# EAGLE board SparkFun_IoT_RedBoard-ESP32-Panel (EAGLE 9.6.2), part 1 of 4
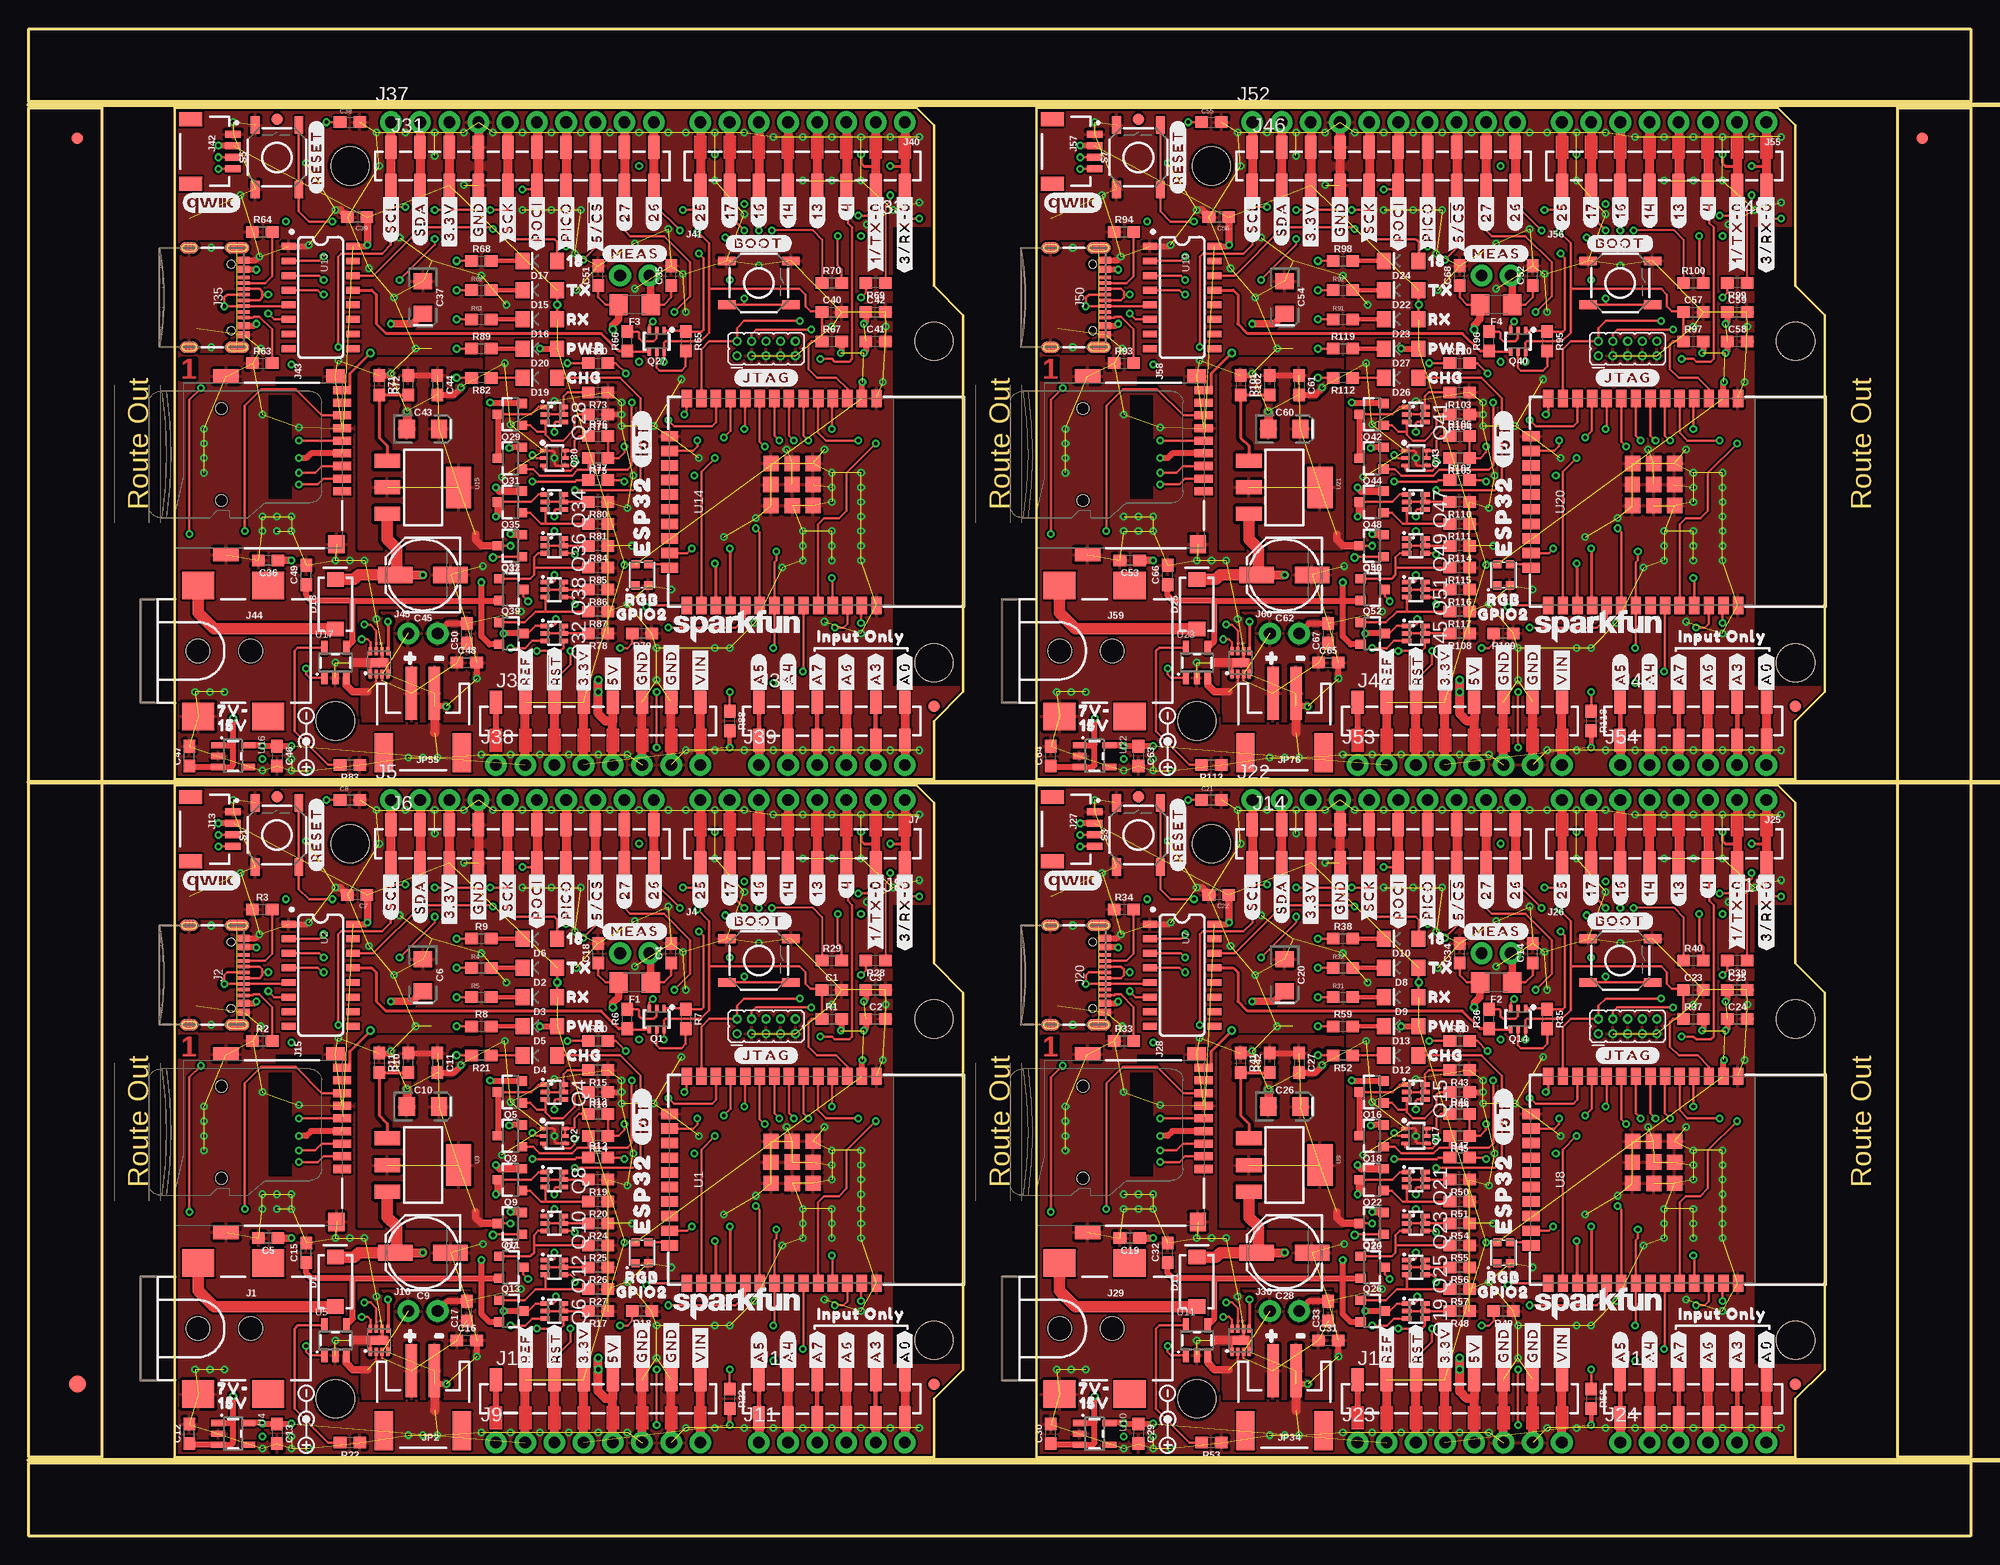
[diagram p0: board, top side]
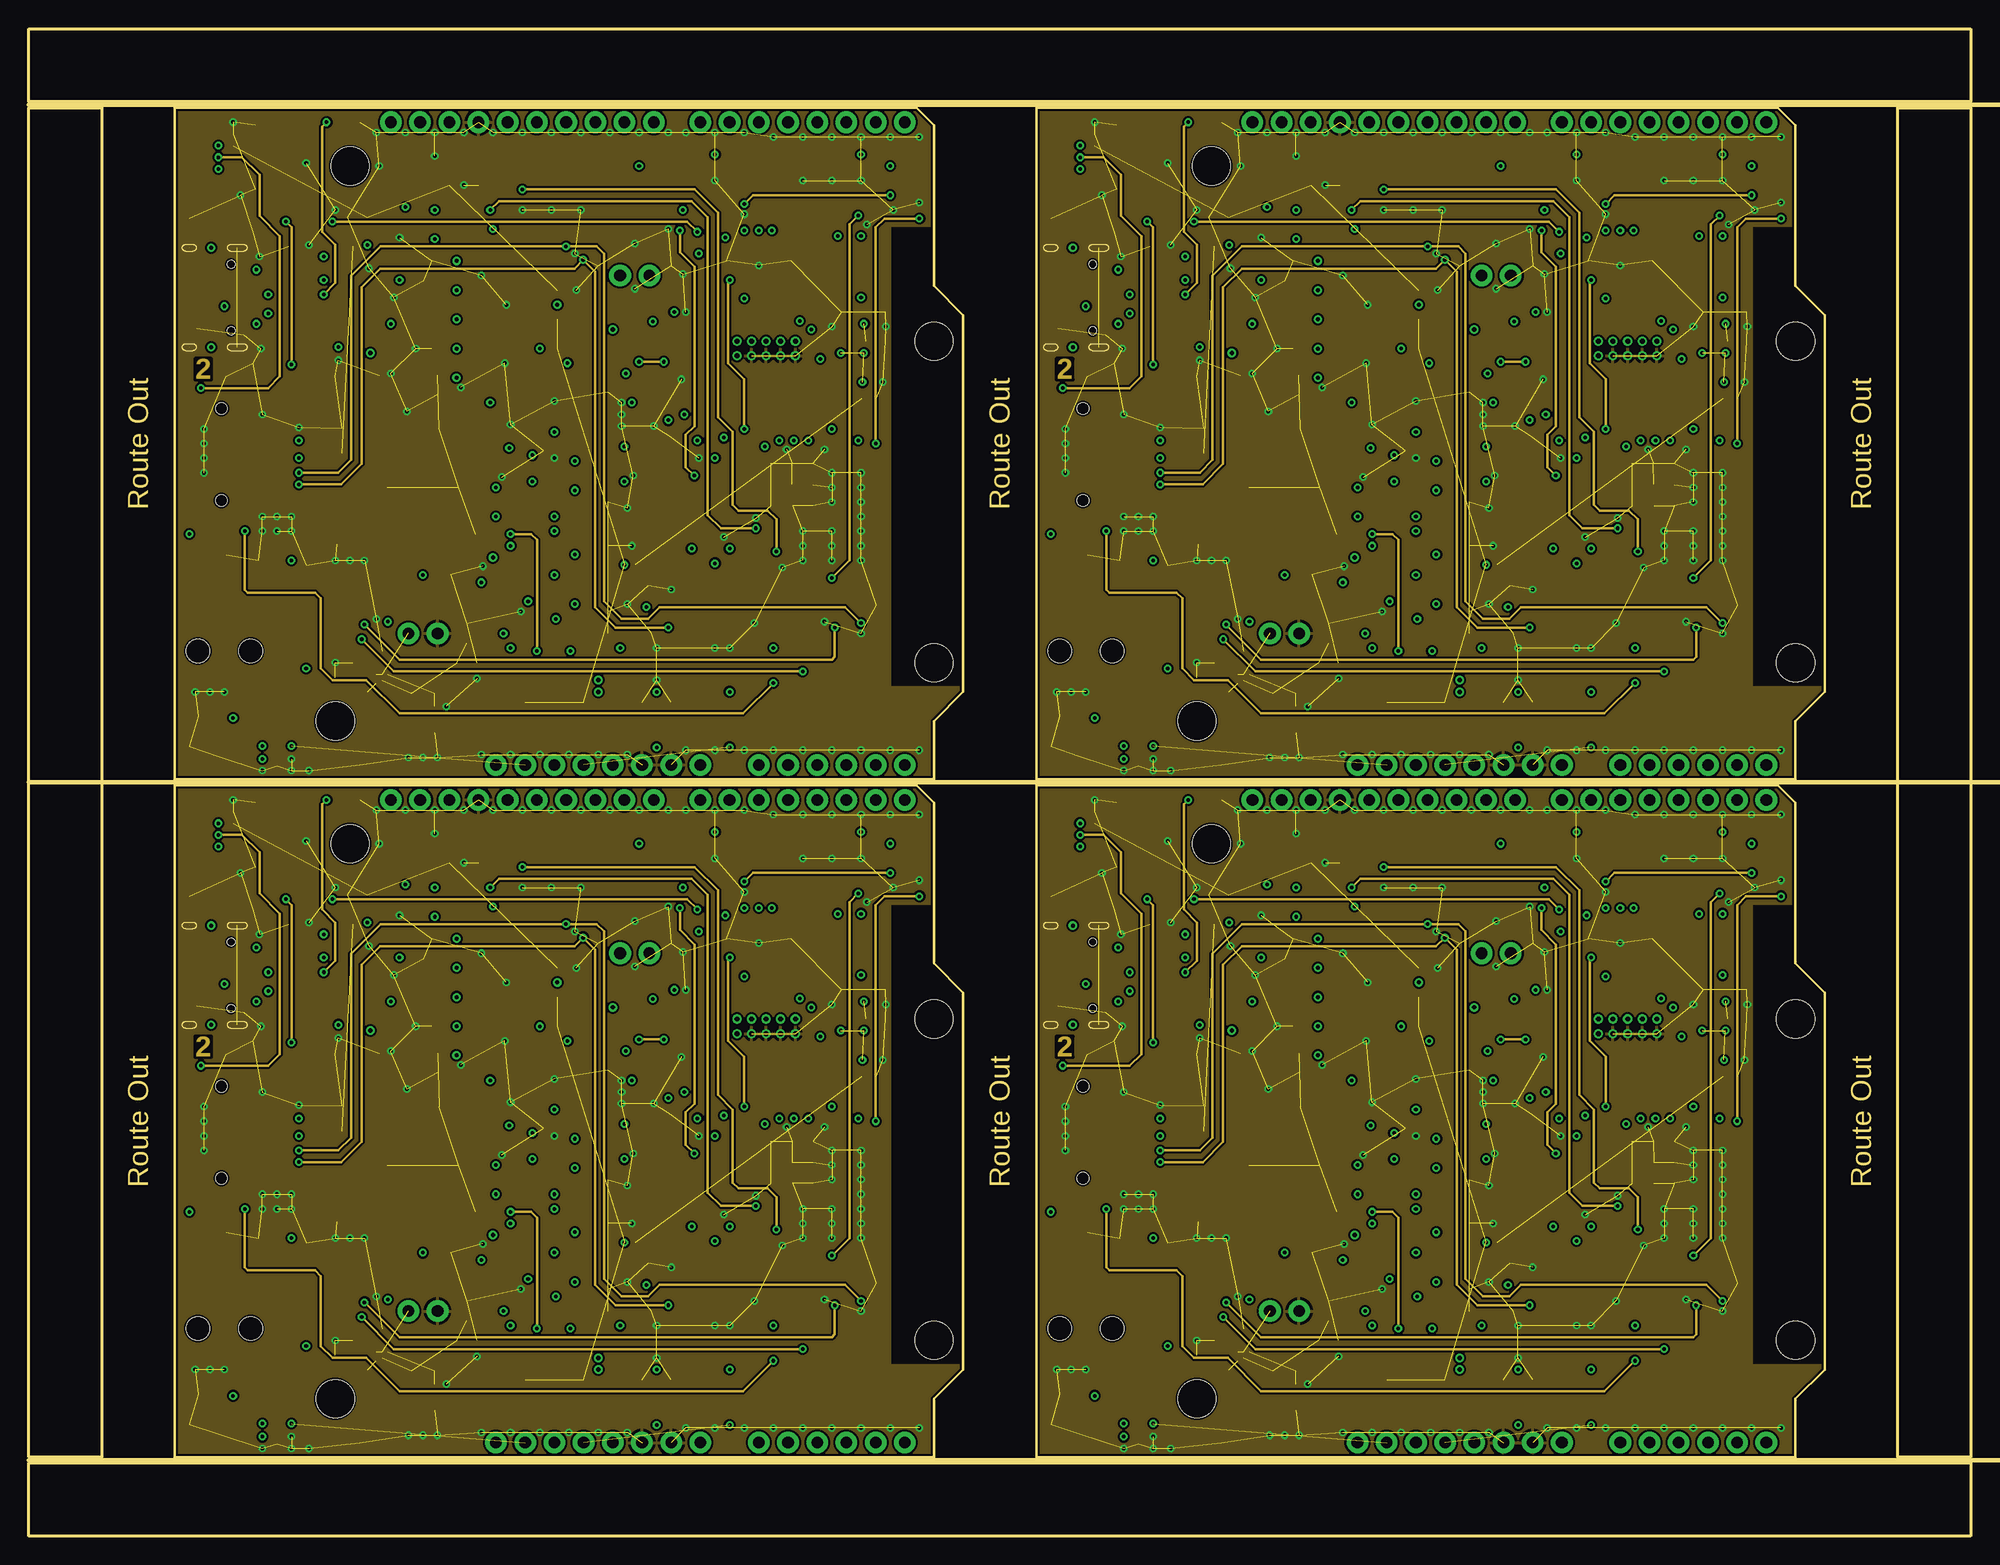
[diagram p1: board, inner layer Route2]
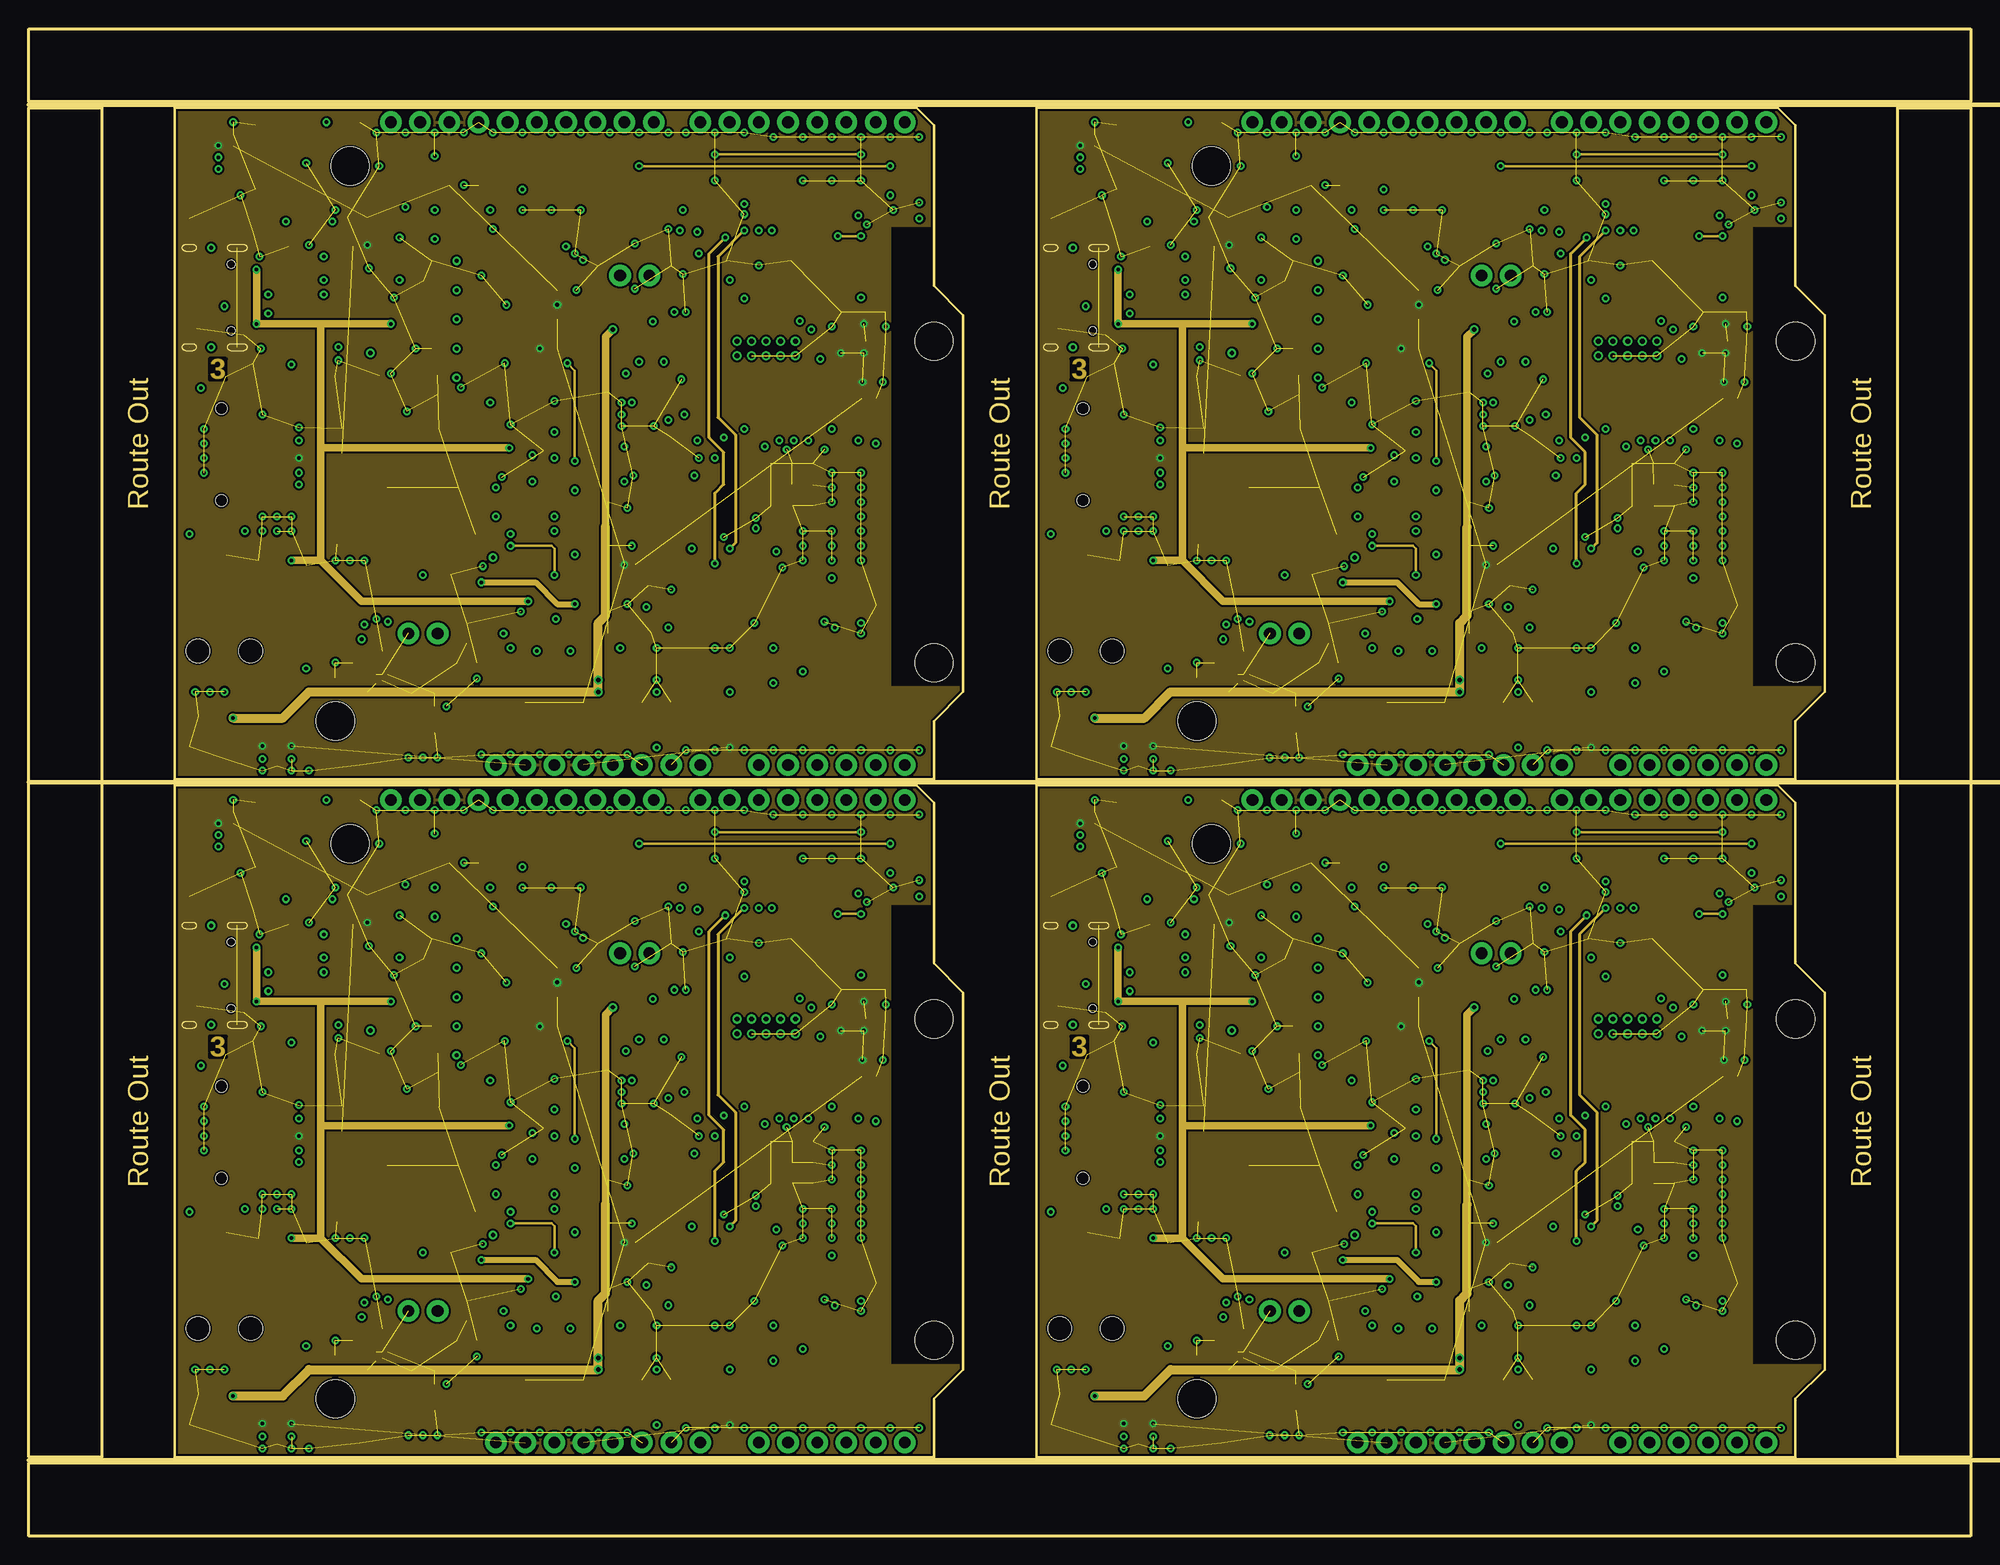
[diagram p2: board, inner layer Route15]
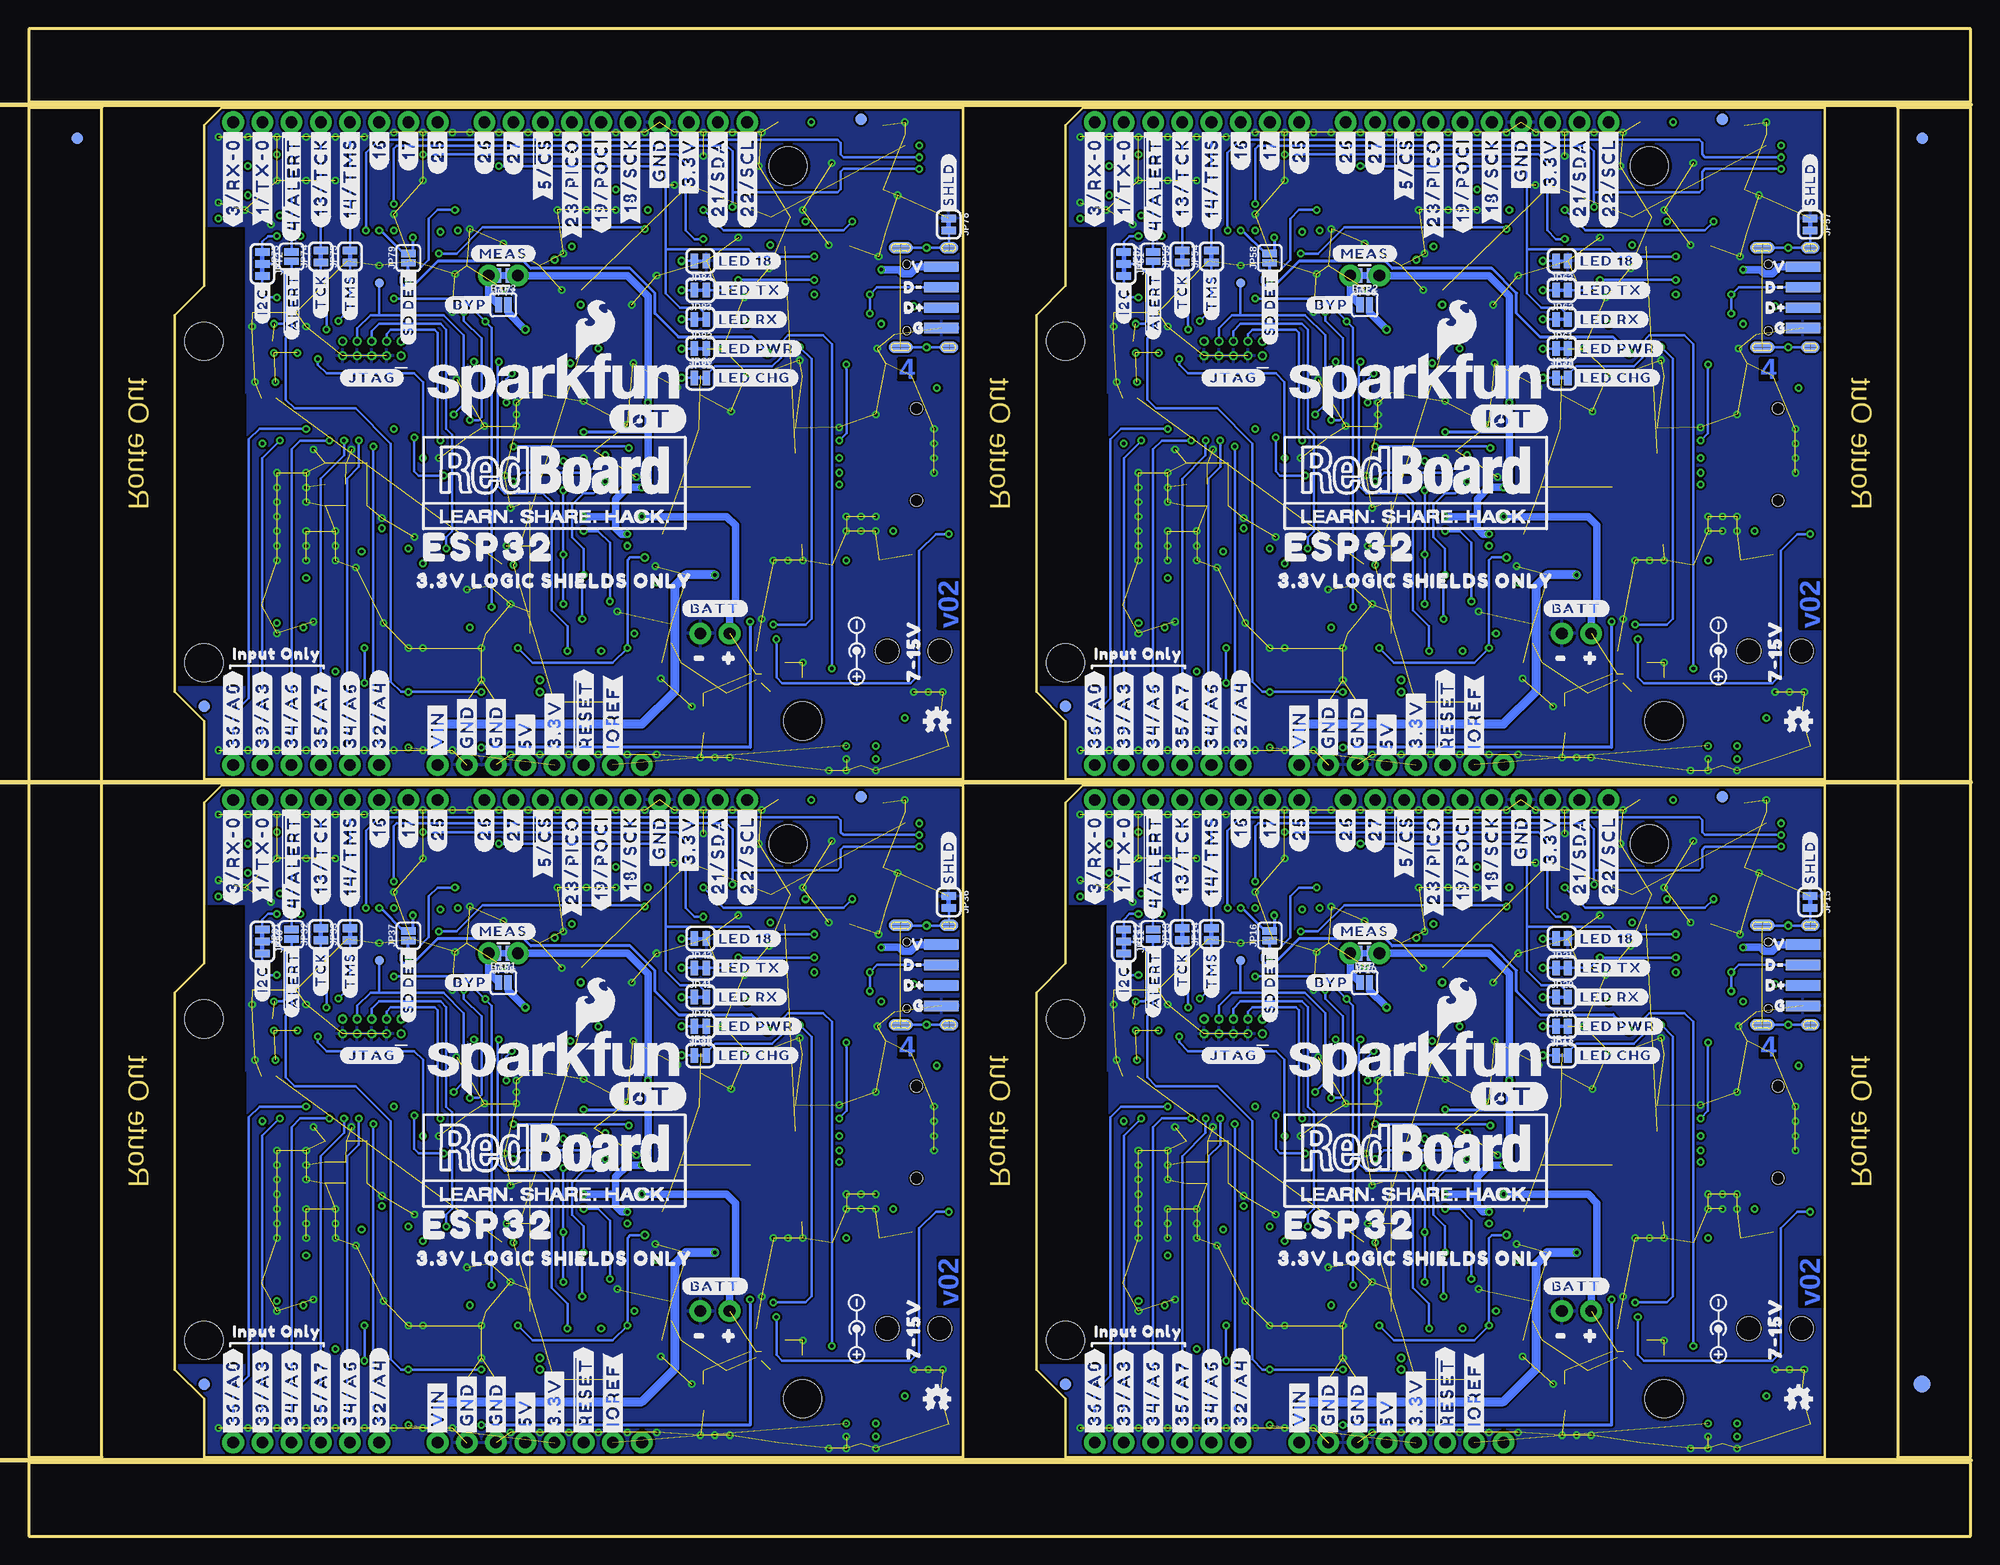
[diagram p3: board, bottom side, seen from below]

Size 168.91 x 131.06 mm. Coordinates in mm from the lower left corner, seen from the top.
Outline: 12.7,65.28 77.22,65.28 78.74,63.75 78.74,49.78 81.28,47.24 81.28,14.48 78.74,11.94 78.74,6.86 12.7,6.86 12.7,65.28
Outline: 87.63,65.28 152.15,65.28 153.67,63.75 153.67,49.78 156.21,47.24 156.21,14.48 153.67,11.94 153.67,6.86 87.63,6.86 87.63,65.28
Outline: 12.7,124.21 77.22,124.21 78.74,122.68 78.74,108.71 81.28,106.17 81.28,73.41 78.74,70.87 78.74,65.79 12.7,65.79 12.7,124.21
Outline: 87.63,124.21 152.15,124.21 153.67,122.68 153.67,108.71 156.21,106.17 156.21,73.41 153.67,70.87 153.67,65.79 87.63,65.79 87.63,124.21
Outline: 0,6.35 168.91,6.35 168.91,0 0,0 0,6.35
Outline: 162.56,124.21 168.91,124.21 168.91,6.86 162.56,6.86 162.56,124.21
Outline: 0,131.06 168.91,131.06 168.91,124.71 0,124.71 0,131.06
Outline: 0,124.21 6.35,124.21 6.35,6.86 0,6.86 0,124.21
Copper layers (1+2*15+16): Top 0.035559375mm / dielectric 0.47751875mm / Route2 0.035559375mm / dielectric 0.47751875mm / Route15 0.035559375mm / dielectric 0.47751875mm / Bottom 0.035559375mm
Design rules "SparkFun_IoT_RedBoard-ESP32": minimum track width 7mil, minimum drill 12mil, track to track 7mil, track to pad 7mil, pad to pad 7mil, via to via 7mil, smd to smd 7mil, copper to edge 7mil, drill to drill 7mil, minimum pad ring 7mil, minimum via ring 7mil, stop-mask expansion 3mil, vias tented up to drill 25mil, thermal gap 10mil
tRestrict: area 75.2,15 to 81.3,54.9; area 150.1,15 to 156.2,54.9; area 75.2,73.9 to 81.3,113.8; area 150.1,73.9 to 156.2,113.8
bRestrict: area 75.2,21.8 to 81.3,40.1; area 75.2,15 to 81.3,54.9; area 150.1,21.8 to 156.2,40.1; area 150.1,15 to 156.2,54.9; area 75.2,80.8 to 81.3,99.1; area 75.2,73.9 to 81.3,113.8; area 150.1,80.8 to 156.2,99.1; area 150.1,73.9 to 156.2,113.8
Milling: 3 lines

## Footprints (pad centres in the part's own frame; a part is rotated, then mirrored left to right if it is on the bottom)
SMT-JUMPER_2_NO_SILK = smd 0.635 x 1.27: 1 -0.406,0; 2 0.406,0
0603 = smd 1.1 x 1: 1 -0.85,0; 2 0.85,0
EIA3216 = smd 1.4 x 1.6: + 1.4,0; - -1.4,0
PANASONIC_D = smd 3 x 1.4: + 2.4,0; - -2.4,0
SMA-DIODE = smd 1.27 x 1.47: A -2.15,0; C 2.15,0
LED-1206-HIDDENSILK = smd 1.2 x 1.4: A -1.5,0; C 1.5,0
WS2812-2020 = smd 0.7 x 0.7: DI -0.915,0.55; DO 0.915,-0.55; GND 0.915,0.55; VCC -0.915,-0.55
FIDUCIAL-1X2 = smd 1 x 1: 1 0,0
FIDUCIAL-1.5X3 = smd 1.5 x 1.5: 1 0,0
1206 = smd 1.6 x 1.8: 1 -1.4,0; 2 1.4,0
POWER_JACK_SMD = smd 2.8 x 2.4: GND 0,-5.7; P$4 6.1,-5.7; VIN0 0,5.7; VIN1 6.1,5.7 | hole 2.032: 0,0; 4.572,0
USB-C-16P-4LAYER-ISOLATED = smd 0.3 x 1: A5 -1.25,-0.34; A6 -0.25,-0.34; A7 0.25,-0.34; A8 1.25,-0.34; B5 1.75,-0.34; B6 0.75,-0.34; B7 -0.75,-0.34; B8 -1.75,-0.34 | smd 0.6 x 1: GND -3.225,-0.34; GND2 3.225,-0.34; VBUS1 -2.45,-0.34; VBUS2 2.45,-0.34 | smd 1 x 2.1: SHLD1 -4.32,-0.915; SHLD2 4.32,-0.915 | smd 1 x 2.1 bottom: SHLD3 -4.32,-0.915; SHLD4 4.32,-0.915 | smd 1 x 1.6: SHLD5 -4.32,-5.095; SHLD8 4.32,-5.095 | smd 1 x 1.6 bottom: SHLD6 -4.32,-5.095; SHLD7 4.32,-5.095 | hole 0.65: -2.89,-1.445; 2.89,-1.445
USB-SOLDER-PADS = smd 3 x 0.9: D+ 0,-0.889; D- 0,0.889; GND 0,-2.667; VBUS 0,2.667
2X5_PTH_SILK_.05 = drill 0.432: 1 0,0; 2 0,1.27; 3 1.27,0; 4 1.27,1.27; 5 2.54,0; 6 2.54,1.27; 7 3.81,0; 8 3.81,1.27; 9 5.08,0; 10 5.08,1.27
1X10_NO_SILK = drill 1.016 pad 1.88: 1 0,0; 2 2.54,0; 3 5.08,0; 4 7.62,0; 5 10.16,0; 6 12.7,0; 7 15.24,0; 8 17.78,0; 9 20.32,0; 10 22.86,0
1X10_SMD_COMBINED = smd 1 x 2: 1A 0,1.65; 1B 0,-1.65; 2A 2.54,1.65; 2B 2.54,-1.65; 3A 5.08,1.65; 3B 5.08,-1.65; 4A 7.62,1.65; 4B 7.62,-1.65; 5A 10.16,1.65; 5B 10.16,-1.65; 6A 12.7,1.65; 6B 12.7,-1.65; 7A 15.24,1.65; 7B 15.24,-1.65; 8A 17.78,1.65; 8B 17.78,-1.65; 9A 20.32,1.65; 9B 20.32,-1.65; 10A 22.86,1.65; 10B 22.86,-1.65
1X08_NO_SILK = drill 1.016 pad 1.88: 1 0,0; 2 2.54,0; 3 5.08,0; 4 7.62,0; 5 10.16,0; 6 12.7,0; 7 15.24,0; 8 17.78,0
1X08_SMD_COMBINED = smd 1 x 2: 1 0,1.65; 2 2.54,1.65; 3 5.08,1.65; 4 7.62,1.652; 5 10.16,1.65; 6 12.7,1.652; 7 15.24,1.65; 8 17.78,1.652
1X06_NO_SILK = drill 1.016 pad 1.88: 1 0,0; 2 2.54,0; 3 5.08,0; 4 7.62,0; 5 10.16,0; 6 12.7,0
1X06_SMD_STRAIGHT_COMBO = smd 1 x 2: 1 0,-1.65; 1-2 0,1.65; 2 2.54,1.65; 2-2 2.54,-1.65; 3 5.08,-1.65; 3-2 5.08,1.65; 4 7.62,1.65; 4-2 7.62,-1.65; 5 10.16,-1.65; 5-2 10.16,1.65; 6 12.7,1.65; 6-2 12.7,-1.65
JST04_1MM_RA = smd 0.6 x 1.35: 1 -1.5,0; 2 -0.5,0; 3 0.5,0; 4 1.5,0 | smd 1.2 x 2: NC1 2.8,-3.675; NC2 -2.8,-3.675
MICROSD-EXTERNALPIN = smd 0.7 x 1.6: 1 2.25,10.5; 2 1.15,10.5; 3 0.05,10.5; 4 -1.05,10.5; 5 -2.15,10.5; 6 -3.25,10.5; 7 -4.35,10.5; 8 -5.45,10.5; 9 -6.55,10.5 | smd 1.2 x 1.6: 10 -7.75,9.9 | smd 1.2 x 2.2: 11 -7.75,0.4; 12 7.75,0.4 | smd 1.6 x 1.4: 13 6.85,10 | hole 1: 3.05,0; -4.95,0
1X02_NO_SILK = drill 1.016 pad 1.88: 1 0,0; 2 2.54,0
JST-2-SMD = smd 1 x 4.6: 1 -1,-3.7; 2 1,-3.7 | smd 1.6 x 3.4: NC1 -3.4,1.5; NC2 3.4,1.5
STAND-OFF = hole 3.302: 0,0
COMBO-JUMPER_2_NC_TRACE = smd 0.635 x 1.27: 1 -0.508,0; 2 0.508,0 | drill 1.016 pad 1.88: 3 -1.27,0; 4 1.27,0
SMT-JUMPER_3_2-NC_TRACE_SILK = smd 0.66 x 1.27: 1 -1.041,0; 2 0,0; 3 1.041,0
SMT-JUMPER_2_NC_TRACE_SILK = smd 0.66 x 1.27: 1 -0.521,0; 2 0.521,0
SC70-6 = smd 0.3 x 0.66: 1 -0.65,-0.92; 2 0,-0.92; 3 0.65,-0.92; 4 0.65,0.92; 5 0,0.92; 6 -0.65,0.92
SOT23-3 = smd 0.8 x 0.9: 1 -0.95,-1; 2 0.95,-1; 3 0,1.1
SOT363_PHILIPS = smd 0.4 x 0.8: 1 -0.65,-0.8; 2 0,-0.8; 3 0.65,-0.8; 4 0.65,0.8; 5 0,0.8; 6 -0.65,0.8
TACTILE_SWITCH_SMD_5.2MM = smd 1.524 x 0.762: 1 -2.794,1.905; 2 2.794,1.905; 3 -2.794,-1.905; 4 2.794,-1.905
PAD.03X.03 = smd 0.762 x 0.762: 1 0,0
ESP-WROOM-32D = smd 0.9 x 1.5: 1 6.43,9; 2 5.16,9; 3 3.89,9; 4 2.62,9; 5 1.35,9; 6 0.08,9; 7 -1.19,9; 8 -2.46,9; 9 -3.73,9; 10 -5,9; 11 -6.27,9; 12 -7.54,9; 13 -8.81,9; 14 -10.08,9; 25 -10.08,-9; 26 -8.81,-9; 27 -7.54,-9; 28 -6.27,-9; 29 -5,-9; 30 -3.73,-9; 31 -2.46,-9; 32 -1.19,-9; 33 0.08,-9; 34 1.35,-9; 35 2.62,-9; 36 3.89,-9; 37 5.16,-9; 38 6.43,-9 | smd 1.5 x 0.9: 15 -11.57,5.715; 16 -11.57,4.445; 17 -11.57,3.175; 18 -11.57,1.905; 19 -11.57,0.635; 20 -11.57,-0.635; 21 -11.57,-1.905; 22 -11.57,-3.175; 23 -11.57,-4.445; 24 -11.57,-5.715 | smd 1.33 x 1.33: GND -0.912,1.531; GNDT1 -2.751,3.346; GNDT2 -2.761,1.516; GNDT3 -2.751,-0.314; GNDT4 -0.891,-0.324; GNDT5 0.909,-0.314; GNDT6 0.909,1.516; GNDT7 0.909,3.346; GNDT8 -0.921,3.346
SO016 = smd 0.6 x 1.2: 1 -4.445,-2.8; 2 -3.175,-2.8; 3 -1.905,-2.8; 4 -0.635,-2.8; 5 0.635,-2.8; 6 1.905,-2.8; 7 3.175,-2.8; 8 4.445,-2.8; 9 4.445,2.8; 10 3.175,2.8; 11 1.905,2.8; 12 0.635,2.8; 13 -0.635,2.8; 14 -1.905,2.8; 15 -3.175,2.8; 16 -4.445,2.8
SOT223 = smd 1.219 x 2.235: 1 -2.311,-3.099; 2 0,-3.099; 3 2.311,-3.099 | smd 3.6 x 2.2: 4 0,3.099
SOT23-5 = smd 0.55 x 1.2: 1 -0.95,-1.3; 2 0,-1.3; 3 0.95,-1.3; 4 0.95,1.3; 5 -0.95,1.3
DFN-8 = smd 0.3 x 0.7: 1 -0.75,-0.99; 2 -0.25,-0.99; 3 0.25,-0.99; 4 0.75,-0.99; 5 0.75,0.99; 6 0.25,0.99; 7 -0.25,0.99; 8 -0.75,0.99 | smd 1.38 x 0.8: 9 0,0

## Placement (x,y rotation side)
BYP  JUMPER-SMT_2_NO_SILK  [SMT-JUMPER_2_NO_SILK]  52.7,48.13 0 bottom
BYP1  JUMPER-SMT_2_NO_SILK  [SMT-JUMPER_2_NO_SILK]  127.64,48.13 0 bottom
BYP2  JUMPER-SMT_2_NO_SILK  [SMT-JUMPER_2_NO_SILK]  52.7,107.06 0 bottom
BYP3  JUMPER-SMT_2_NO_SILK  [SMT-JUMPER_2_NO_SILK]  127.64,107.06 0 bottom
C1  0.1uF  [0603]  69.85,47.5 0 top
C2  0.1uF  [0603]  73.66,44.96 0 top
C3  10uF  [0603]  73.66,47.5 0 top
C4  0.1uF  [0603]  55.88,50.67 90 top
C5  0.1uF  [0603]  20.83,25.91 180 top
C6  10uF  [EIA3216]  34.29,48.77 270 top
C7  0.1uF  [0603]  28.57,55.75 180 top
C8  10nF  [0603]  27.94,64.01 0 top
C9  47uF  [PANASONIC_D]  34.29,24.64 180 top
C10  10uF  [EIA3216]  34.29,37.34 0 top
C11  0.1uF  [0603]  35.56,41.15 270 top
C12  0.1uF  [0603]  13.97,8.89 90 top
C13  0.1uF  [0603]  21.59,8.89 270 top
C14  0.1uF  [0603]  130.81,50.67 90 top
C15  4.7uF  [0603]  24.13,24.64 90 top
C16  4.7uF  [0603]  38.1,17.02 0 top
C17  0.1uF  [0603]  38.1,19.56 90 top
C18  0.1uF  [0603]  49.53,50.67 90 top
C19  0.1uF  [0603]  95.76,25.91 180 top
C20  10uF  [EIA3216]  109.22,48.77 270 top
C21  10nF  [0603]  102.87,64.01 0 top
C22  0.1uF  [0603]  103.51,55.75 180 top
C23  0.1uF  [0603]  144.78,47.5 0 top
C24  0.1uF  [0603]  148.59,44.96 0 top
C25  10uF  [0603]  148.59,47.5 0 top
C26  10uF  [EIA3216]  109.22,37.34 0 top
C27  0.1uF  [0603]  110.49,41.15 270 top
C28  47uF  [PANASONIC_D]  109.22,24.64 180 top
C29  0.1uF  [0603]  96.52,8.89 270 top
C30  0.1uF  [0603]  88.9,8.89 90 top
C31  4.7uF  [0603]  113.03,17.02 0 top
C32  4.7uF  [0603]  99.06,24.64 90 top
C33  0.1uF  [0603]  113.03,19.56 90 top
C34  0.1uF  [0603]  124.46,50.67 90 top
C35  0.1uF  [0603]  55.88,109.6 90 top
C36  0.1uF  [0603]  20.83,84.84 180 top
C37  10uF  [EIA3216]  34.29,107.7 270 top
C38  10nF  [0603]  27.94,122.94 0 top
C39  0.1uF  [0603]  28.57,114.68 180 top
C40  0.1uF  [0603]  69.85,106.43 0 top
C41  0.1uF  [0603]  73.66,103.89 0 top
C42  10uF  [0603]  73.66,106.43 0 top
C43  10uF  [EIA3216]  34.29,96.27 0 top
C44  0.1uF  [0603]  35.56,100.08 270 top
C45  47uF  [PANASONIC_D]  34.29,83.57 180 top
C46  0.1uF  [0603]  21.59,67.82 270 top
C47  0.1uF  [0603]  13.97,67.82 90 top
C48  4.7uF  [0603]  38.1,75.95 0 top
C49  4.7uF  [0603]  24.13,83.57 90 top
C50  0.1uF  [0603]  38.1,78.49 90 top
C51  0.1uF  [0603]  49.53,109.6 90 top
C52  0.1uF  [0603]  130.81,109.6 90 top
C53  0.1uF  [0603]  95.76,84.84 180 top
C54  10uF  [EIA3216]  109.22,107.7 270 top
C55  10nF  [0603]  102.87,122.94 0 top
C56  0.1uF  [0603]  103.51,114.68 180 top
C57  0.1uF  [0603]  144.78,106.43 0 top
C58  0.1uF  [0603]  148.59,103.89 0 top
C59  10uF  [0603]  148.59,106.43 0 top
C60  10uF  [EIA3216]  109.22,96.27 0 top
C61  0.1uF  [0603]  110.49,100.08 270 top
C62  47uF  [PANASONIC_D]  109.22,83.57 180 top
C63  0.1uF  [0603]  96.52,67.82 270 top
C64  0.1uF  [0603]  88.9,67.82 90 top
C65  4.7uF  [0603]  113.03,75.95 0 top
C66  4.7uF  [0603]  99.06,83.57 90 top
C67  0.1uF  [0603]  113.03,78.49 90 top
C68  0.1uF  [0603]  124.46,109.6 90 top
D1  3A/40V/500mV  [SMA-DIODE]  26.67,22.1 90 top
D2  GREEN  [LED-1206-HIDDENSILK]  44.45,49.4 180 top
D3  YELLOW  [LED-1206-HIDDENSILK]  44.45,46.86 180 top
D4  YELLOW  [LED-1206-HIDDENSILK]  44.45,41.78 180 top
D5  GREEN  [LED-1206-HIDDENSILK]  44.45,44.32 180 top
D6  BLUE  [LED-1206-HIDDENSILK]  44.45,51.94 180 top
D7  WS2812_2020  [WS2812-2020]  53.34,24.64 270 top
D8  GREEN  [LED-1206-HIDDENSILK]  119.38,49.4 180 top
D9  YELLOW  [LED-1206-HIDDENSILK]  119.38,46.86 180 top
D10  BLUE  [LED-1206-HIDDENSILK]  119.38,51.94 180 top
D11  3A/40V/500mV  [SMA-DIODE]  101.6,22.1 90 top
D12  YELLOW  [LED-1206-HIDDENSILK]  119.38,41.78 180 top
D13  GREEN  [LED-1206-HIDDENSILK]  119.38,44.32 180 top
D14  WS2812_2020  [WS2812-2020]  128.27,24.64 270 top
D15  GREEN  [LED-1206-HIDDENSILK]  44.45,108.33 180 top
D16  YELLOW  [LED-1206-HIDDENSILK]  44.45,105.79 180 top
D17  BLUE  [LED-1206-HIDDENSILK]  44.45,110.87 180 top
D18  3A/40V/500mV  [SMA-DIODE]  26.67,81.03 90 top
D19  YELLOW  [LED-1206-HIDDENSILK]  44.45,100.71 180 top
D20  GREEN  [LED-1206-HIDDENSILK]  44.45,103.25 180 top
D21  WS2812_2020  [WS2812-2020]  53.34,83.57 270 top
D22  GREEN  [LED-1206-HIDDENSILK]  119.38,108.33 180 top
D23  YELLOW  [LED-1206-HIDDENSILK]  119.38,105.79 180 top
D24  BLUE  [LED-1206-HIDDENSILK]  119.38,110.87 180 top
D25  3A/40V/500mV  [SMA-DIODE]  101.6,81.03 90 top
D26  YELLOW  [LED-1206-HIDDENSILK]  119.38,100.71 180 top
D27  GREEN  [LED-1206-HIDDENSILK]  119.38,103.25 180 top
D28  WS2812_2020  [WS2812-2020]  128.27,83.57 270 top
E$1  [FIDUCIAL-1X2]  4.23,121.54 0 top
E$2  [FIDUCIAL-1X2]  4.23,121.54 0 bottom
E$3  [FIDUCIAL-1X2]  164.68,121.54 0 top
E$4  [FIDUCIAL-1X2]  164.68,121.54 0 bottom
E$5  [FIDUCIAL-1.5X3]  4.23,13.21 0 top
E$6  [FIDUCIAL-1.5X3]  4.23,13.21 0 bottom
F1  6V/0.75A/1.5A  [1206]  52.7,48.13 180 top
F2  6V/0.75A/1.5A  [1206]  127.64,48.13 180 top
F3  6V/0.75A/1.5A  [1206]  52.7,107.06 180 top
F4  6V/0.75A/1.5A  [1206]  127.64,107.06 180 top
J1  5.5x2.1mm Barrel  [POWER_JACK_SMD]  14.73,18.03 0 top
J2  USB-C  [USB-C-16P-4LAYER-ISOLATED]  19.05,48.77 270 top
J3  USB_SOLDER_PADS  [USB-SOLDER-PADS]  14.6,48.77 0 bottom
J4  [2X5_PTH_SILK_.05]  61.59,43.69 0 top
J5  M10NO_SILK  [1X10_NO_SILK]  31.5,64.01 0 top
J6  [1X10_SMD_COMBINED]  31.5,60.2 0 top
J7  [1X08_NO_SILK]  76.2,64.01 180 top
J8  [1X08_SMD_COMBINED]  76.2,60.2 180 top
J9  [1X08_NO_SILK]  40.64,8.13 0 top
J10  [1X08_SMD_COMBINED]  40.64,11.94 0 top
J11  [1X06_NO_SILK]  63.5,8.13 0 top
J12  [1X06_SMD_STRAIGHT_COMBO]  63.5,11.94 0 top
J13  QWIIC_RIGHT_ANGLE  [JST04_1MM_RA]  17.78,61.47 270 top
J14  [1X10_SMD_COMBINED]  106.43,60.2 0 top
J15  MICRO-SD-PUSH-PUSH-EXT-PIN  [MICROSD-EXTERNALPIN]  16.76,34.16 270 top
J16  [1X02_NO_SILK]  33.02,19.56 0 top
J17  [1X08_SMD_COMBINED]  115.57,11.94 0 top
J18  [1X08_SMD_COMBINED]  151.13,60.2 180 top
J19  [1X06_SMD_STRAIGHT_COMBO]  138.43,11.94 0 top
J20  USB-C  [USB-C-16P-4LAYER-ISOLATED]  93.98,48.77 270 top
J21  USB_SOLDER_PADS  [USB-SOLDER-PADS]  89.53,48.77 0 bottom
J22  M10NO_SILK  [1X10_NO_SILK]  106.43,64.01 0 top
J23  [1X08_NO_SILK]  115.57,8.13 0 top
J24  [1X06_NO_SILK]  138.43,8.13 0 top
J25  [1X08_NO_SILK]  151.13,64.01 180 top
J26  [2X5_PTH_SILK_.05]  136.53,43.69 0 top
J27  QWIIC_RIGHT_ANGLE  [JST04_1MM_RA]  92.71,61.47 270 top
J28  MICRO-SD-PUSH-PUSH-EXT-PIN  [MICROSD-EXTERNALPIN]  91.69,34.16 270 top
J29  5.5x2.1mm Barrel  [POWER_JACK_SMD]  89.66,18.03 0 top
J30  [1X02_NO_SILK]  107.95,19.56 0 top
J31  [1X10_SMD_COMBINED]  31.5,119.13 0 top
J32  [1X08_SMD_COMBINED]  40.64,70.87 0 top
J33  [1X08_SMD_COMBINED]  76.2,119.13 180 top
J34  [1X06_SMD_STRAIGHT_COMBO]  63.5,70.87 0 top
J35  USB-C  [USB-C-16P-4LAYER-ISOLATED]  19.05,107.7 270 top
J36  USB_SOLDER_PADS  [USB-SOLDER-PADS]  14.6,107.7 0 bottom
J37  M10NO_SILK  [1X10_NO_SILK]  31.5,122.94 0 top
J38  [1X08_NO_SILK]  40.64,67.06 0 top
J39  [1X06_NO_SILK]  63.5,67.06 0 top
J40  [1X08_NO_SILK]  76.2,122.94 180 top
J41  [2X5_PTH_SILK_.05]  61.59,102.62 0 top
J42  QWIIC_RIGHT_ANGLE  [JST04_1MM_RA]  17.78,120.4 270 top
J43  MICRO-SD-PUSH-PUSH-EXT-PIN  [MICROSD-EXTERNALPIN]  16.76,93.09 270 top
J44  5.5x2.1mm Barrel  [POWER_JACK_SMD]  14.73,76.96 0 top
J45  [1X02_NO_SILK]  33.02,78.49 0 top
J46  [1X10_SMD_COMBINED]  106.43,119.13 0 top
J47  [1X08_SMD_COMBINED]  115.57,70.87 0 top
J48  [1X08_SMD_COMBINED]  151.13,119.13 180 top
J49  [1X06_SMD_STRAIGHT_COMBO]  138.43,70.87 0 top
J50  USB-C  [USB-C-16P-4LAYER-ISOLATED]  93.98,107.7 270 top
J51  USB_SOLDER_PADS  [USB-SOLDER-PADS]  89.53,107.7 0 bottom
J52  M10NO_SILK  [1X10_NO_SILK]  106.43,122.94 0 top
J53  [1X08_NO_SILK]  115.57,67.06 0 top
J54  [1X06_NO_SILK]  138.43,67.06 0 top
J55  [1X08_NO_SILK]  151.13,122.94 180 top
J56  [2X5_PTH_SILK_.05]  136.53,102.62 0 top
J57  QWIIC_RIGHT_ANGLE  [JST04_1MM_RA]  92.71,120.4 270 top
J58  MICRO-SD-PUSH-PUSH-EXT-PIN  [MICROSD-EXTERNALPIN]  91.69,93.09 270 top
J59  5.5x2.1mm Barrel  [POWER_JACK_SMD]  89.66,76.96 0 top
J60  [1X02_NO_SILK]  107.95,78.49 0 top
JP1  FIDUCIAL1X2  [FIDUCIAL-1X2]  78.74,13.21 0 top
JP2  LiPo  [JST-2-SMD]  34.29,10.67 180 top
JP3  STAND-OFF  [STAND-OFF]  26.67,11.94 0 top
JP4  STAND-OFF  [STAND-OFF]  78.74,17.02 0 top
JP5  STAND-OFF  [STAND-OFF]  78.74,44.96 0 top
JP6  STAND-OFF  [STAND-OFF]  27.94,60.2 0 top
JP7  FIDUCIAL1X2  [FIDUCIAL-1X2]  21.59,64.26 0 bottom
JP8  FIDUCIAL1X2  [FIDUCIAL-1X2]  78.74,13.21 0 bottom
JP9  FIDUCIAL1X2  [FIDUCIAL-1X2]  21.59,64.26 0 top
JP10  JUMPER-COMBO_2_NC_TRACE  [COMBO-JUMPER_2_NC_TRACE]  52.7,50.67 180 bottom
JP11  JUMPER-SMT_3_2-NC_TRACE_SILK  [SMT-JUMPER_3_2-NC_TRACE_SILK]  73.66,51.69 270 bottom
JP12  JUMPER-SMT_2_NO_SILK  [SMT-JUMPER_2_NO_SILK]  71.12,52.32 90 bottom
JP13  JUMPER-SMT_2_NC_TRACE_SILK  [SMT-JUMPER_2_NC_TRACE_SILK]  68.58,52.32 90 bottom
JP14  JUMPER-SMT_2_NC_TRACE_SILK  [SMT-JUMPER_2_NC_TRACE_SILK]  66.04,52.32 90 bottom
JP15  SHLD  [SMT-JUMPER_2_NC_TRACE_SILK]  13.97,55.12 270 bottom
JP16  SD_DET  [SMT-JUMPER_2_NO_SILK]  60.96,52.2 90 bottom
JP17  JUMPER-SMT_2_NC_TRACE_SILK  [SMT-JUMPER_2_NC_TRACE_SILK]  35.56,41.78 0 bottom
JP18  JUMPER-SMT_2_NC_TRACE_SILK  [SMT-JUMPER_2_NC_TRACE_SILK]  35.56,44.32 180 bottom
JP19  JUMPER-SMT_2_NC_TRACE_SILK  [SMT-JUMPER_2_NC_TRACE_SILK]  35.56,46.86 180 bottom
JP20  JUMPER-SMT_2_NC_TRACE_SILK  [SMT-JUMPER_2_NC_TRACE_SILK]  35.56,49.4 180 bottom
JP21  JUMPER-SMT_2_NC_TRACE_SILK  [SMT-JUMPER_2_NC_TRACE_SILK]  35.56,51.94 180 bottom
JP22  STAND-OFF  [STAND-OFF]  101.6,11.94 0 top
JP23  STAND-OFF  [STAND-OFF]  153.67,17.02 0 top
JP24  STAND-OFF  [STAND-OFF]  153.67,44.96 0 top
JP25  STAND-OFF  [STAND-OFF]  102.87,60.2 0 top
JP26  FIDUCIAL1X2  [FIDUCIAL-1X2]  96.52,64.26 0 bottom
JP27  FIDUCIAL1X2  [FIDUCIAL-1X2]  153.67,13.21 0 top
JP28  FIDUCIAL1X2  [FIDUCIAL-1X2]  153.67,13.21 0 bottom
JP29  FIDUCIAL1X2  [FIDUCIAL-1X2]  96.52,64.26 0 top
JP30  JUMPER-SMT_3_2-NC_TRACE_SILK  [SMT-JUMPER_3_2-NC_TRACE_SILK]  148.59,51.69 270 bottom
JP31  JUMPER-SMT_2_NO_SILK  [SMT-JUMPER_2_NO_SILK]  146.05,52.32 90 bottom
JP32  JUMPER-SMT_2_NC_TRACE_SILK  [SMT-JUMPER_2_NC_TRACE_SILK]  143.51,52.32 90 bottom
JP33  JUMPER-SMT_2_NC_TRACE_SILK  [SMT-JUMPER_2_NC_TRACE_SILK]  140.97,52.32 90 bottom
JP34  LiPo  [JST-2-SMD]  109.22,10.67 180 top
JP35  JUMPER-COMBO_2_NC_TRACE  [COMBO-JUMPER_2_NC_TRACE]  127.64,50.67 180 bottom
JP36  SHLD  [SMT-JUMPER_2_NC_TRACE_SILK]  88.9,55.12 270 bottom
JP37  SD_DET  [SMT-JUMPER_2_NO_SILK]  135.89,52.2 90 bottom
JP38  JUMPER-SMT_2_NC_TRACE_SILK  [SMT-JUMPER_2_NC_TRACE_SILK]  110.49,41.78 0 bottom
JP39  JUMPER-SMT_2_NC_TRACE_SILK  [SMT-JUMPER_2_NC_TRACE_SILK]  110.49,44.32 180 bottom
JP40  JUMPER-SMT_2_NC_TRACE_SILK  [SMT-JUMPER_2_NC_TRACE_SILK]  110.49,46.86 180 bottom
JP41  JUMPER-SMT_2_NC_TRACE_SILK  [SMT-JUMPER_2_NC_TRACE_SILK]  110.49,49.4 180 bottom
JP42  JUMPER-SMT_2_NC_TRACE_SILK  [SMT-JUMPER_2_NC_TRACE_SILK]  110.49,51.94 180 bottom
JP43  STAND-OFF  [STAND-OFF]  26.67,70.87 0 top
JP44  STAND-OFF  [STAND-OFF]  78.74,75.95 0 top
JP45  STAND-OFF  [STAND-OFF]  78.74,103.89 0 top
JP46  STAND-OFF  [STAND-OFF]  27.94,119.13 0 top
JP47  FIDUCIAL1X2  [FIDUCIAL-1X2]  21.59,123.19 0 bottom
JP48  FIDUCIAL1X2  [FIDUCIAL-1X2]  78.74,72.14 0 top
JP49  FIDUCIAL1X2  [FIDUCIAL-1X2]  78.74,72.14 0 bottom
JP50  FIDUCIAL1X2  [FIDUCIAL-1X2]  21.59,123.19 0 top
JP51  JUMPER-SMT_3_2-NC_TRACE_SILK  [SMT-JUMPER_3_2-NC_TRACE_SILK]  73.66,110.62 270 bottom
JP52  JUMPER-SMT_2_NO_SILK  [SMT-JUMPER_2_NO_SILK]  71.12,111.25 90 bottom
JP53  JUMPER-SMT_2_NC_TRACE_SILK  [SMT-JUMPER_2_NC_TRACE_SILK]  68.58,111.25 90 bottom
JP54  JUMPER-SMT_2_NC_TRACE_SILK  [SMT-JUMPER_2_NC_TRACE_SILK]  66.04,111.25 90 bottom
JP55  LiPo  [JST-2-SMD]  34.29,69.6 180 top
JP56  JUMPER-COMBO_2_NC_TRACE  [COMBO-JUMPER_2_NC_TRACE]  52.7,109.6 180 bottom
JP57  SHLD  [SMT-JUMPER_2_NC_TRACE_SILK]  13.97,114.05 270 bottom
JP58  SD_DET  [SMT-JUMPER_2_NO_SILK]  60.96,111.12 90 bottom
JP59  JUMPER-SMT_2_NC_TRACE_SILK  [SMT-JUMPER_2_NC_TRACE_SILK]  35.56,100.71 0 bottom
JP60  JUMPER-SMT_2_NC_TRACE_SILK  [SMT-JUMPER_2_NC_TRACE_SILK]  35.56,103.25 180 bottom
JP61  JUMPER-SMT_2_NC_TRACE_SILK  [SMT-JUMPER_2_NC_TRACE_SILK]  35.56,105.79 180 bottom
JP62  JUMPER-SMT_2_NC_TRACE_SILK  [SMT-JUMPER_2_NC_TRACE_SILK]  35.56,108.33 180 bottom
JP63  JUMPER-SMT_2_NC_TRACE_SILK  [SMT-JUMPER_2_NC_TRACE_SILK]  35.56,110.87 180 bottom
JP64  STAND-OFF  [STAND-OFF]  101.6,70.87 0 top
JP65  STAND-OFF  [STAND-OFF]  153.67,75.95 0 top
JP66  STAND-OFF  [STAND-OFF]  153.67,103.89 0 top
JP67  STAND-OFF  [STAND-OFF]  102.87,119.13 0 top
JP68  FIDUCIAL1X2  [FIDUCIAL-1X2]  96.52,123.19 0 bottom
JP69  FIDUCIAL1X2  [FIDUCIAL-1X2]  153.67,72.14 0 top
JP70  FIDUCIAL1X2  [FIDUCIAL-1X2]  153.67,72.14 0 bottom
JP71  FIDUCIAL1X2  [FIDUCIAL-1X2]  96.52,123.19 0 top
JP72  JUMPER-SMT_3_2-NC_TRACE_SILK  [SMT-JUMPER_3_2-NC_TRACE_SILK]  148.59,110.62 270 bottom
JP73  JUMPER-SMT_2_NO_SILK  [SMT-JUMPER_2_NO_SILK]  146.05,111.25 90 bottom
JP74  JUMPER-SMT_2_NC_TRACE_SILK  [SMT-JUMPER_2_NC_TRACE_SILK]  143.51,111.25 90 bottom
JP75  JUMPER-SMT_2_NC_TRACE_SILK  [SMT-JUMPER_2_NC_TRACE_SILK]  140.97,111.25 90 bottom
JP76  LiPo  [JST-2-SMD]  109.22,69.6 180 top
JP77  JUMPER-COMBO_2_NC_TRACE  [COMBO-JUMPER_2_NC_TRACE]  127.64,109.6 180 bottom
JP78  SHLD  [SMT-JUMPER_2_NC_TRACE_SILK]  88.9,114.05 270 bottom
JP79  SD_DET  [SMT-JUMPER_2_NO_SILK]  135.89,111.12 90 bottom
JP80  JUMPER-SMT_2_NC_TRACE_SILK  [SMT-JUMPER_2_NC_TRACE_SILK]  110.49,100.71 0 bottom
JP81  JUMPER-SMT_2_NC_TRACE_SILK  [SMT-JUMPER_2_NC_TRACE_SILK]  110.49,103.25 180 bottom
JP82  JUMPER-SMT_2_NC_TRACE_SILK  [SMT-JUMPER_2_NC_TRACE_SILK]  110.49,105.79 180 bottom
JP83  JUMPER-SMT_2_NC_TRACE_SILK  [SMT-JUMPER_2_NC_TRACE_SILK]  110.49,108.33 180 bottom
JP84  JUMPER-SMT_2_NC_TRACE_SILK  [SMT-JUMPER_2_NC_TRACE_SILK]  110.49,110.87 180 bottom
LOGO1  SFE_LOGO_NAME.1_INCH  [SFE_LOGO_NAME_.1]  61.59,20.19 0 top
LOGO2  QWIIC_LOGO_5MM  [QWIIC_5MM]  15.88,57.02 0 top
LOGO3  OSHW-LOGOMINI  [OSHW-LOGO-MINI]  14.99,11.94 0 bottom
LOGO4  SFE_LOGO_NAME.1_INCH  [SFE_LOGO_NAME_.1]  136.53,20.19 0 top
LOGO5  QWIIC_LOGO_5MM  [QWIIC_5MM]  90.81,57.02 0 top
LOGO6  SFE_LOGO_NAME_FLAME.2_INCH  [SFE_LOGO_NAME_FLAME_.2]  48.26,41.15 0 bottom
LOGO7  OSHW-LOGOMINI  [OSHW-LOGO-MINI]  89.92,11.94 0 bottom
LOGO8  SFE_LOGO_NAME_FLAME.2_INCH  [SFE_LOGO_NAME_FLAME_.2]  123.19,41.15 0 bottom
LOGO9  SFE_LOGO_NAME.1_INCH  [SFE_LOGO_NAME_.1]  61.59,79.12 0 top
LOGO10  QWIIC_LOGO_5MM  [QWIIC_5MM]  15.88,115.95 0 top
LOGO11  OSHW-LOGOMINI  [OSHW-LOGO-MINI]  14.99,70.87 0 bottom
LOGO12  SFE_LOGO_NAME_FLAME.2_INCH  [SFE_LOGO_NAME_FLAME_.2]  48.26,100.08 0 bottom
LOGO13  SFE_LOGO_NAME.1_INCH  [SFE_LOGO_NAME_.1]  136.53,79.12 0 top
LOGO14  QWIIC_LOGO_5MM  [QWIIC_5MM]  90.81,115.95 0 top
LOGO15  OSHW-LOGOMINI  [OSHW-LOGO-MINI]  89.92,70.87 0 bottom
LOGO16  SFE_LOGO_NAME_FLAME.2_INCH  [SFE_LOGO_NAME_FLAME_.2]  123.19,100.08 0 bottom
Q1  MBT3904DW1T1  [SC70-6]  54.61,44.96 180 top
Q2  [SC70-6]  45.72,34.8 270 top
Q3  20V/4.2A/52mΩ/1.4W  [SOT23-3]  41.91,34.8 90 top
Q4  [SOT363_PHILIPS]  45.72,38.61 270 top
Q5  20V/4.2A/52mΩ/1.4W  [SOT23-3]  41.91,38.61 90 top
Q6  [SOT363_PHILIPS]  45.72,19.56 270 top
Q7  20V/4.2A/52mΩ/1.4W  [SOT23-3]  41.91,27.18 90 top
Q8  [SOT363_PHILIPS]  45.72,30.99 270 top
Q9  20V/4.2A/52mΩ/1.4W  [SOT23-3]  41.91,30.99 90 top
Q10  [SOT363_PHILIPS]  45.72,27.18 270 top
Q11  20V/4.2A/52mΩ/1.4W  [SOT23-3]  41.91,23.37 270 top
Q12  [SOT363_PHILIPS]  45.72,23.37 270 top
Q13  20V/4.2A/52mΩ/1.4W  [SOT23-3]  41.91,19.56 270 top
Q14  MBT3904DW1T1  [SC70-6]  129.54,44.96 180 top
Q15  [SOT363_PHILIPS]  120.65,38.61 270 top
Q16  20V/4.2A/52mΩ/1.4W  [SOT23-3]  116.84,38.61 90 top
Q17  [SC70-6]  120.65,34.8 270 top
Q18  20V/4.2A/52mΩ/1.4W  [SOT23-3]  116.84,34.8 90 top
Q19  [SOT363_PHILIPS]  120.65,19.56 270 top
Q20  20V/4.2A/52mΩ/1.4W  [SOT23-3]  116.84,27.18 90 top
Q21  [SOT363_PHILIPS]  120.65,30.99 270 top
Q22  20V/4.2A/52mΩ/1.4W  [SOT23-3]  116.84,30.99 90 top
Q23  [SOT363_PHILIPS]  120.65,27.18 270 top
Q24  20V/4.2A/52mΩ/1.4W  [SOT23-3]  116.84,23.37 270 top
Q25  [SOT363_PHILIPS]  120.65,23.37 270 top
Q26  20V/4.2A/52mΩ/1.4W  [SOT23-3]  116.84,19.56 270 top
Q27  MBT3904DW1T1  [SC70-6]  54.61,103.89 180 top
Q28  [SOT363_PHILIPS]  45.72,97.54 270 top
Q29  20V/4.2A/52mΩ/1.4W  [SOT23-3]  41.91,97.54 90 top
Q30  [SC70-6]  45.72,93.73 270 top
Q31  20V/4.2A/52mΩ/1.4W  [SOT23-3]  41.91,93.73 90 top
Q32  [SOT363_PHILIPS]  45.72,78.49 270 top
Q33  20V/4.2A/52mΩ/1.4W  [SOT23-3]  41.91,86.11 90 top
Q34  [SOT363_PHILIPS]  45.72,89.92 270 top
Q35  20V/4.2A/52mΩ/1.4W  [SOT23-3]  41.91,89.92 90 top
Q36  [SOT363_PHILIPS]  45.72,86.11 270 top
Q37  20V/4.2A/52mΩ/1.4W  [SOT23-3]  41.91,82.3 270 top
Q38  [SOT363_PHILIPS]  45.72,82.3 270 top
Q39  20V/4.2A/52mΩ/1.4W  [SOT23-3]  41.91,78.49 270 top
Q40  MBT3904DW1T1  [SC70-6]  129.54,103.89 180 top
Q41  [SOT363_PHILIPS]  120.65,97.54 270 top
Q42  20V/4.2A/52mΩ/1.4W  [SOT23-3]  116.84,97.54 90 top
Q43  [SC70-6]  120.65,93.73 270 top
Q44  20V/4.2A/52mΩ/1.4W  [SOT23-3]  116.84,93.73 90 top
Q45  [SOT363_PHILIPS]  120.65,78.49 270 top
Q46  20V/4.2A/52mΩ/1.4W  [SOT23-3]  116.84,86.11 90 top
Q47  [SOT363_PHILIPS]  120.65,89.92 270 top
Q48  20V/4.2A/52mΩ/1.4W  [SOT23-3]  116.84,89.92 90 top
Q49  [SOT363_PHILIPS]  120.65,86.11 270 top
Q50  20V/4.2A/52mΩ/1.4W  [SOT23-3]  116.84,82.3 270 top
Q51  [SOT363_PHILIPS]  120.65,82.3 270 top
Q52  20V/4.2A/52mΩ/1.4W  [SOT23-3]  116.84,78.49 270 top
R1  10k  [0603]  69.85,44.96 0 top
R2  5.1k  [0603]  20.32,43.05 0 top
R3  5.1k  [0603]  20.32,54.48 0 top
R4  1k  [0603]  39.37,49.4 0 top
R5  1k  [0603]  39.37,46.86 0 top
R6  10k  [0603]  52.07,44.96 90 top
R7  10k  [0603]  57.15,44.96 270 top
R8  2.2k  [0603]  39.37,44.32 0 top
R9  4.7k  [0603]  39.37,51.94 0 top
R10  240  [0603]  33.02,41.15 90 top
R11  715  [0603]  30.48,41.15 270 top
R12  10k  [0603]  49.53,32.89 0 top
R13  10k  [0603]  49.53,36.7 0 top
R14  10k  [0603]  49.53,34.8 180 top
R15  10k  [0603]  49.53,40.51 180 top
R16  47k  [0603]  49.53,38.61 180 top
R17  100k  [0603]  49.53,19.56 180 top
R18  1M  [0603]  53.34,19.56 180 top
R19  100k  [0603]  49.53,30.99 180 top
R20  1M  [0603]  49.53,29.08 180 top
R21  1k  [0603]  39.37,41.78 180 top
R22  2.0k  [0603]  27.94,8.13 180 top
R23  10k  [0603]  60.96,11.94 270 top
R24  100k  [0603]  49.53,27.18 180 top
R25  1M  [0603]  49.53,25.27 180 top
R26  100k  [0603]  49.53,23.37 180 top
R27  1M  [0603]  49.53,21.46 180 top
R28  2.2k  [0603]  73.66,50.04 180 top
R29  2.2k  [0603]  69.85,50.04 0 top
R30  100  [0603]  49.53,43.05 0 top
R31  1k  [0603]  114.3,46.86 0 top
R32  1k  [0603]  114.3,49.4 0 top
R33  5.1k  [0603]  95.25,43.05 0 top
R34  5.1k  [0603]  95.25,54.48 0 top
R35  10k  [0603]  132.08,44.96 270 top
R36  10k  [0603]  127,44.96 90 top
R37  10k  [0603]  144.78,44.96 0 top
R38  4.7k  [0603]  114.3,51.94 0 top
R39  2.2k  [0603]  148.59,50.04 180 top
R40  2.2k  [0603]  144.78,50.04 0 top
R41  715  [0603]  105.41,41.15 270 top
R42  240  [0603]  107.95,41.15 90 top
R43  10k  [0603]  124.46,40.51 180 top
R44  47k  [0603]  124.46,38.61 180 top
R45  10k  [0603]  124.46,34.8 180 top
R46  10k  [0603]  124.46,36.7 0 top
R47  10k  [0603]  124.46,32.89 0 top
R48  100k  [0603]  124.46,19.56 180 top
R49  1M  [0603]  128.27,19.56 180 top
R50  100k  [0603]  124.46,30.99 180 top
R51  1M  [0603]  124.46,29.08 180 top
R52  1k  [0603]  114.3,41.78 180 top
R53  2.0k  [0603]  102.87,8.13 180 top
R54  100k  [0603]  124.46,27.18 180 top
R55  1M  [0603]  124.46,25.27 180 top
R56  100k  [0603]  124.46,23.37 180 top
R57  1M  [0603]  124.46,21.46 180 top
R58  10k  [0603]  135.89,11.94 270 top
R59  2.2k  [0603]  114.3,44.32 0 top
R60  100  [0603]  124.46,43.05 0 top
R61  1k  [0603]  39.37,105.79 0 top
R62  1k  [0603]  39.37,108.33 0 top
R63  5.1k  [0603]  20.32,101.98 0 top
R64  5.1k  [0603]  20.32,113.41 0 top
R65  10k  [0603]  57.15,103.89 270 top
R66  10k  [0603]  52.07,103.89 90 top
R67  10k  [0603]  69.85,103.89 0 top
R68  4.7k  [0603]  39.37,110.87 0 top
R69  2.2k  [0603]  73.66,108.97 180 top
R70  2.2k  [0603]  69.85,108.97 0 top
R71  715  [0603]  30.48,100.08 270 top
R72  240  [0603]  33.02,100.08 90 top
R73  10k  [0603]  49.53,99.44 180 top
R74  47k  [0603]  49.53,97.54 180 top
R75  10k  [0603]  49.53,93.73 180 top
R76  10k  [0603]  49.53,95.63 0 top
R77  10k  [0603]  49.53,91.82 0 top
R78  100k  [0603]  49.53,78.49 180 top
R79  1M  [0603]  53.34,78.49 180 top
R80  100k  [0603]  49.53,89.92 180 top
R81  1M  [0603]  49.53,88.01 180 top
R82  1k  [0603]  39.37,100.71 180 top
R83  2.0k  [0603]  27.94,67.06 180 top
R84  100k  [0603]  49.53,86.11 180 top
R85  1M  [0603]  49.53,84.2 180 top
R86  100k  [0603]  49.53,82.3 180 top
R87  1M  [0603]  49.53,80.39 180 top
R88  10k  [0603]  60.96,70.87 270 top
R89  2.2k  [0603]  39.37,103.25 0 top
R90  100  [0603]  49.53,101.98 0 top
R91  1k  [0603]  114.3,105.79 0 top
R92  1k  [0603]  114.3,108.33 0 top
R93  5.1k  [0603]  95.25,101.98 0 top
R94  5.1k  [0603]  95.25,113.41 0 top
R95  10k  [0603]  132.08,103.89 270 top
R96  10k  [0603]  127,103.89 90 top
R97  10k  [0603]  144.78,103.89 0 top
R98  4.7k  [0603]  114.3,110.87 0 top
R99  2.2k  [0603]  148.59,108.97 180 top
R100  2.2k  [0603]  144.78,108.97 0 top
R101  715  [0603]  105.41,100.08 270 top
R102  240  [0603]  107.95,100.08 90 top
R103  10k  [0603]  124.46,99.44 180 top
R104  47k  [0603]  124.46,97.54 180 top
R105  10k  [0603]  124.46,93.73 180 top
R106  10k  [0603]  124.46,95.63 0 top
R107  10k  [0603]  124.46,91.82 0 top
R108  100k  [0603]  124.46,78.49 180 top
R109  1M  [0603]  128.27,78.49 180 top
R110  100k  [0603]  124.46,89.92 180 top
R111  1M  [0603]  124.46,88.01 180 top
R112  1k  [0603]  114.3,100.71 180 top
R113  2.0k  [0603]  102.87,67.06 180 top
R114  100k  [0603]  124.46,86.11 180 top
R115  1M  [0603]  124.46,84.2 180 top
R116  100k  [0603]  124.46,82.3 180 top
R117  1M  [0603]  124.46,80.39 180 top
R118  10k  [0603]  135.89,70.87 270 top
R119  2.2k  [0603]  114.3,103.25 0 top
R120  100  [0603]  124.46,101.98 0 top
S1  Reset  [TACTILE_SWITCH_SMD_5.2MM]  21.59,60.96 90 top
S2  GPIO0  [TACTILE_SWITCH_SMD_5.2MM]  63.5,50.04 0 top
S3  Reset  [TACTILE_SWITCH_SMD_5.2MM]  96.52,60.96 90 top
S4  GPIO0  [TACTILE_SWITCH_SMD_5.2MM]  138.43,50.04 0 top
S5  Reset  [TACTILE_SWITCH_SMD_5.2MM]  21.59,119.89 90 top
S6  GPIO0  [TACTILE_SWITCH_SMD_5.2MM]  63.5,108.97 0 top
S7  Reset  [TACTILE_SWITCH_SMD_5.2MM]  96.52,119.89 90 top
S8  GPIO0  [TACTILE_SWITCH_SMD_5.2MM]  138.43,108.97 0 top
TP1  TEST-POINT3  [PAD.03X.03]  63.5,50.04 0 bottom
TP2  TEST-POINT3  [PAD.03X.03]  138.43,50.04 0 bottom
TP3  TEST-POINT3  [PAD.03X.03]  63.5,108.97 0 bottom
TP4  TEST-POINT3  [PAD.03X.03]  138.43,108.97 0 bottom
U1  ESP-WROOM-3232D  [ESP-WROOM-32D]  67.31,30.99 0 top
U2  CH340C  [SO016]  25.4,48.77 270 top
U3  LM1117  [SOT223]  34.29,32.26 270 top
U4  3.3V  [SOT23-5]  17.78,8.89 270 top
U5  MCP73831  [SOT23-5]  26.67,17.02 0 top
U6  MAX17048  [DFN-8]  30.48,17.02 0 top
U7  CH340C  [SO016]  100.33,48.77 270 top
U8  ESP-WROOM-3232D  [ESP-WROOM-32D]  142.24,30.99 0 top
U9  LM1117  [SOT223]  109.22,32.26 270 top
U10  3.3V  [SOT23-5]  92.71,8.89 270 top
U11  MCP73831  [SOT23-5]  101.6,17.02 0 top
U12  MAX17048  [DFN-8]  105.41,17.02 0 top
U13  CH340C  [SO016]  25.4,107.7 270 top
U14  ESP-WROOM-3232D  [ESP-WROOM-32D]  67.31,89.92 0 top
U15  LM1117  [SOT223]  34.29,91.19 270 top
U16  3.3V  [SOT23-5]  17.78,67.82 270 top
U17  MCP73831  [SOT23-5]  26.67,75.95 0 top
U18  MAX17048  [DFN-8]  30.48,75.95 0 top
U19  CH340C  [SO016]  100.33,107.7 270 top
U20  ESP-WROOM-3232D  [ESP-WROOM-32D]  142.24,89.92 0 top
U21  LM1117  [SOT223]  109.22,91.19 270 top
U22  3.3V  [SOT23-5]  92.71,67.82 270 top
U23  MCP73831  [SOT23-5]  101.6,75.95 0 top
U24  MAX17048  [DFN-8]  105.41,75.95 0 top
U$1  [V323252]  90.3,51.43 0 bottom
U$2  [#SCL#34]  106.43,57.78 90 top
U$3  [#SCL#34]  31.5,57.78 90 top
U$4  [#SDA#33]  34.04,57.78 90 top
U$5  [#3#3V#33]  36.58,57.78 90 top
U$6  [#GND#32]  39.12,57.78 90 top
U$7  [#SCK#31]  41.66,57.78 90 top
U$8  [#POCI#30]  44.2,57.78 90 top
U$9  [#PICO#29]  46.74,57.78 90 top
U$10  [1836]  46.1,51.94 0 top
U$11  [#MEAS#1851]  52.7,52.58 0 bottom
U$12  [#27#27]  51.82,57.78 90 top
U$13  [#26#26]  54.36,57.78 90 top
U$14  [TX1838]  46.1,49.4 0 top
U$15  [RX1839]  46.1,46.86 0 top
U$16  [PWR1837]  46.1,44.32 0 top
U$17  [CHG1840]  46.1,41.78 0 top
U$18  [#25#18]  58.42,57.78 90 top
U$19  [#17#17]  60.96,57.78 90 top
U$20  [#16#15]  63.5,57.78 90 top
U$21  [#14#14]  66.04,57.78 90 top
U$22  [#13#5]  68.58,57.78 90 top
U$23  [#4#2]  71.12,57.78 90 top
U$24  [#3#RX#0#4]  76.2,63.5 90 bottom
U$25  [#3#RX#0#0]  76.2,57.78 90 top
U$26  [#RESET#1842]  25.02,60.96 90 top
U$27  [#BOOT#1841]  63.5,53.47 0 top
U$28  [#JTAG#1847]  64.14,41.78 0 top
U$29  [#A0#1843]  76.2,14.35 90 top
U$30  [#A3#1843]  73.66,14.35 90 top
U$31  [#A6#1843]  71.12,14.35 90 top
U$32  [#A7#1843]  68.58,14.35 90 top
U$33  [#A4#1843]  66.04,14.35 90 top
U$34  [#A5#1843]  63.5,14.35 90 top
U$35  [#VIN#1843]  58.42,14.35 90 top
U$36  [#GND#1844]  55.88,14.35 90 top
U$37  [#GND#1844]  53.34,14.35 90 top
U$38  [#5V#1845]  50.8,14.35 90 top
U$39  [#3#3V#1845]  48.26,14.35 90 top
U$40  [##RST##1845]  45.72,14.35 90 top
U$41  [#REF#1846]  43.18,14.35 90 top
U$42  [#MEAS#1851]  52.7,52.58 0 top
U$43  [#1849]  33.27,17.4 0 top
U$44  [#1850]  35.81,17.4 0 top
U$45  [#BATT#1848]  34.29,21.72 0 bottom
U$46  [#JTAG#1847]  64.14,41.78 0 bottom
U$47  [#IOT#132321874]  40.13,38.23 0 bottom
U$48  [ESP321855]  53.34,25.27 90 top
U$49  [#LED_18#0]  34.67,51.94 0 bottom
U$50  [#39#A3#321862]  73.66,8.64 90 bottom
U$51  [#36#A0#321862]  76.2,8.64 90 bottom
U$52  [#34#A6#32321865]  66.04,8.64 90 bottom
U$53  [#35#A7#321862]  68.58,8.64 90 bottom
U$54  [#32#A4#32321865]  63.5,8.64 90 bottom
U$55  [#34#A6#321862]  71.12,8.64 90 bottom
U$56  [#VIN#321862]  58.42,8.64 90 bottom
U$57  [#GND#321863]  55.88,8.64 90 bottom
U$58  [#5V#321864]  50.8,8.64 90 bottom
U$59  [#3#3V#321864]  48.26,8.64 90 bottom
U$60  [#GND#321863]  53.34,8.64 90 bottom
U$61  [##RESET##321864]  45.72,8.64 90 bottom
U$62  [#IOREF#321865]  43.18,8.64 90 bottom
U$63  [#5##CS##0]  49.28,57.78 90 top
U$64  [#BYP#0]  57.78,48.13 0 bottom
U$65  [RGB0]  53.34,22.48 0 top
U$66  [#13#TCK#32321869]  68.58,63.5 90 bottom
U$67  [#14#TMS#32321869]  66.04,63.5 90 bottom
U$68  [#16#32321869]  63.5,63.5 90 bottom
U$69  [#17#32321869]  60.96,63.5 90 bottom
U$70  [#25#32321869]  58.42,63.5 90 bottom
U$71  [#26#32321869]  54.36,63.5 90 bottom
U$72  [#5##CS##32321869]  49.28,63.5 90 bottom
U$73  [#23#PICO#321866]  46.74,63.5 90 bottom
U$74  [#19#POCI#321866]  44.2,63.5 90 bottom
U$75  [#18#SCK#32321869]  41.66,63.5 90 bottom
U$76  [#21#SDA#32321869]  34.04,63.5 90 bottom
U$77  [#22#SCL#32321869]  31.5,63.5 90 bottom
U$78  [#27#32321869]  51.82,63.5 90 bottom
U$79  [#GND#321866]  39.12,63.5 90 bottom
U$80  [#3#3V#321866]  36.58,63.5 90 bottom
U$81  [#SHLD#0]  13.97,56.01 90 bottom
U$82  [#SDA#33]  108.97,57.78 90 top
U$83  [D#32321863]  15.49,49.66 0 bottom
U$84  [D#32321862]  15.37,47.88 0 bottom
U$85  [G32321864]  15.37,46.1 0 bottom
U$86  [#1849]  33.02,17.4 0 bottom
U$87  [V323252]  15.37,51.43 0 bottom
U$88  [#1850]  35.56,17.4 0 bottom
U$89  [#I2C#1855]  73.66,50.29 90 bottom
U$90  [##ALERT##1852]  71.12,51.56 90 bottom
U$91  [#TMS#1854]  66.04,51.43 90 bottom
U$92  [#TCK#1853]  68.58,51.43 90 bottom
U$93  [ESP32321856]  53.97,27.05 0 bottom
U$94  [POLARITY_MARKING_CENTER_POSITIVE#JPG]  24.13,10.16 270 top
U$95  [#3#3V#33]  111.51,57.78 90 top
U$96  [INPUT_ONLY321867]  72.39,19.3 0 top
U$97  [INPUT_ONLY321867]  72.39,17.78 0 bottom
U$98  [REDBOARD_LOGO]  59.69,28.45 0 bottom
U$99  [POLARITY_MARKING_CENTER_POSITIVE#JPG]  21.97,18.03 270 bottom
U$100  [#IOT#132321869]  53.34,36.45 90 top
U$101  [7#15V32321861]  17.02,18.03 90 bottom
U$102  [#4##ALERT##0]  71.12,63.5 90 bottom
U$103  [3#3V_LOGIC_SHIELDS_ONLY132321876]  48.26,24.13 0 bottom
U$104  [#1#TX#0#0]  73.66,57.78 90 top
U$105  [#1#TX#0#2]  73.66,63.5 90 bottom
U$106  [7V#0]  17.78,12.83 0 top
U$107  [15V0]  17.78,11.56 0 top
U$108  [#SD_DET#0]  60.96,51.43 90 bottom
U$109  [#LED_TX#0]  34.67,49.4 0 bottom
U$110  [#LED_RX#0]  34.67,46.86 0 bottom
U$111  [#LED_PWR#0]  34.67,44.32 0 bottom
U$112  [#LED_CHG#0]  34.67,41.78 0 bottom
U$113  [GPIO20]  53.34,21.21 0 top
U$114  [#GND#32]  114.05,57.78 90 top
U$115  [#SCK#31]  116.59,57.78 90 top
U$116  [#POCI#30]  119.13,57.78 90 top
U$117  [#PICO#29]  121.67,57.78 90 top
U$118  [1836]  121.03,51.94 0 top
U$119  [#27#27]  126.75,57.78 90 top
U$120  [#26#26]  129.29,57.78 90 top
U$121  [TX1838]  121.03,49.4 0 top
U$122  [RX1839]  121.03,46.86 0 top
U$123  [PWR1837]  121.03,44.32 0 top
U$124  [CHG1840]  121.03,41.78 0 top
U$125  [#25#18]  133.35,57.78 90 top
U$126  [#17#17]  135.89,57.78 90 top
U$127  [#16#15]  138.43,57.78 90 top
U$128  [#14#14]  140.97,57.78 90 top
U$129  [#13#5]  143.51,57.78 90 top
U$130  [#4#2]  146.05,57.78 90 top
U$131  [#RESET#1842]  99.95,60.96 90 top
U$132  [#BOOT#1841]  138.43,53.47 0 top
U$133  [#JTAG#1847]  139.06,41.78 0 top
U$134  [#A0#1843]  151.13,14.35 90 top
U$135  [#A3#1843]  148.59,14.35 90 top
U$136  [#A6#1843]  146.05,14.35 90 top
U$137  [#A7#1843]  143.51,14.35 90 top
U$138  [#A4#1843]  140.97,14.35 90 top
U$139  [#A5#1843]  138.43,14.35 90 top
U$140  [#VIN#1843]  133.35,14.35 90 top
U$141  [#GND#1844]  130.81,14.35 90 top
U$142  [#GND#1844]  128.27,14.35 90 top
U$143  [#5V#1845]  125.73,14.35 90 top
U$144  [#3#3V#1845]  123.19,14.35 90 top
U$145  [##RST##1845]  120.65,14.35 90 top
U$146  [#REF#1846]  118.11,14.35 90 top
U$147  [#MEAS#1851]  127.64,52.58 0 top
U$148  [#1849]  108.2,17.4 0 top
U$149  [#1850]  110.74,17.4 0 top
U$150  [#BATT#1848]  109.22,21.72 0 bottom
U$151  [#JTAG#1847]  139.06,41.78 0 bottom
U$152  [ESP321855]  128.27,25.27 90 top
U$153  [#39#A3#321862]  148.59,8.64 90 bottom
U$154  [#36#A0#321862]  151.13,8.64 90 bottom
U$155  [#34#A6#32321865]  140.97,8.64 90 bottom
U$156  [#35#A7#321862]  143.51,8.64 90 bottom
U$157  [#32#A4#32321865]  138.43,8.64 90 bottom
U$158  [#34#A6#321862]  146.05,8.64 90 bottom
U$159  [#VIN#321862]  133.35,8.64 90 bottom
U$160  [#GND#321863]  130.81,8.64 90 bottom
U$161  [#5V#321864]  125.73,8.64 90 bottom
U$162  [#3#3V#321864]  123.19,8.64 90 bottom
U$163  [#GND#321863]  128.27,8.64 90 bottom
U$164  [##RESET##321864]  120.65,8.64 90 bottom
U$165  [#IOREF#321865]  118.11,8.64 90 bottom
U$166  [#13#TCK#32321869]  143.51,63.5 90 bottom
U$167  [#14#TMS#32321869]  140.97,63.5 90 bottom
U$168  [#16#32321869]  138.43,63.5 90 bottom
U$169  [#17#32321869]  135.89,63.5 90 bottom
U$170  [#25#32321869]  133.35,63.5 90 bottom
U$171  [#26#32321869]  129.29,63.5 90 bottom
U$172  [#5##CS##32321869]  124.21,63.5 90 bottom
U$173  [#23#PICO#321866]  121.67,63.5 90 bottom
U$174  [#19#POCI#321866]  119.13,63.5 90 bottom
U$175  [#18#SCK#32321869]  116.59,63.5 90 bottom
U$176  [#21#SDA#32321869]  108.97,63.5 90 bottom
U$177  [#22#SCL#32321869]  106.43,63.5 90 bottom
U$178  [#27#32321869]  126.75,63.5 90 bottom
U$179  [#GND#321866]  114.05,63.5 90 bottom
U$180  [#3#3V#321866]  111.51,63.5 90 bottom
U$181  [D#32321863]  90.42,49.66 0 bottom
U$182  [D#32321862]  90.3,47.88 0 bottom
U$183  [G32321864]  90.3,46.1 0 bottom
U$184  [#1849]  107.95,17.4 0 bottom
U$185  [#1850]  110.49,17.4 0 bottom
U$186  [#I2C#1855]  148.59,50.29 90 bottom
U$187  [##ALERT##1852]  146.05,51.56 90 bottom
U$188  [#TMS#1854]  140.97,51.43 90 bottom
U$189  [#TCK#1853]  143.51,51.43 90 bottom
U$190  [INPUT_ONLY321867]  147.32,19.3 0 top
U$191  [INPUT_ONLY321867]  147.32,17.78 0 bottom
U$192  [REDBOARD_LOGO]  134.62,28.45 0 bottom
U$193  [#IOT#132321869]  128.27,36.45 90 top
U$194  [ESP32321856]  128.91,27.05 0 bottom
U$195  [#IOT#132321874]  115.06,38.23 0 bottom
U$196  [7#15V32321861]  91.95,18.03 90 bottom
U$197  [3#3V_LOGIC_SHIELDS_ONLY132321876]  123.19,24.13 0 bottom
U$198  [#3#RX#0#0]  151.13,57.78 90 top
U$199  [#1#TX#0#0]  148.59,57.78 90 top
U$200  [#4##ALERT##0]  146.05,63.5 90 bottom
U$201  [#3#RX#0#4]  151.13,63.5 90 bottom
U$202  [#1#TX#0#2]  148.59,63.5 90 bottom
U$203  [#5##CS##0]  124.21,57.78 90 top
U$204  [#BYP#0]  132.72,48.13 0 bottom
U$205  [#SHLD#0]  88.9,56.01 90 bottom
U$206  [RGB0]  128.27,22.48 0 top
U$207  [#MEAS#1851]  127.64,52.58 0 bottom
U$208  [POLARITY_MARKING_CENTER_POSITIVE#JPG]  99.06,10.16 270 top
U$209  [POLARITY_MARKING_CENTER_POSITIVE#JPG]  96.9,18.03 270 bottom
U$210  [7V#0]  92.71,12.83 0 top
U$211  [15V0]  92.71,11.56 0 top
U$212  [#SD_DET#0]  135.89,51.43 90 bottom
U$213  [#LED_18#0]  109.6,51.94 0 bottom
U$214  [#LED_TX#0]  109.6,49.4 0 bottom
U$215  [#LED_RX#0]  109.6,46.86 0 bottom
U$216  [#LED_PWR#0]  109.6,44.32 0 bottom
U$217  [#LED_CHG#0]  109.6,41.78 0 bottom
U$218  [GPIO20]  128.27,21.21 0 top
U$219  [V323252]  15.37,110.36 0 bottom
U$220  [#SCL#34]  31.5,116.71 90 top
U$221  [#SDA#33]  34.04,116.71 90 top
U$222  [#3#3V#33]  36.58,116.71 90 top
U$223  [#GND#32]  39.12,116.71 90 top
U$224  [#SCK#31]  41.66,116.71 90 top
U$225  [#POCI#30]  44.2,116.71 90 top
U$226  [#PICO#29]  46.74,116.71 90 top
U$227  [1836]  46.1,110.87 0 top
U$228  [#27#27]  51.82,116.71 90 top
U$229  [#26#26]  54.36,116.71 90 top
U$230  [TX1838]  46.1,108.33 0 top
U$231  [RX1839]  46.1,105.79 0 top
U$232  [PWR1837]  46.1,103.25 0 top
U$233  [CHG1840]  46.1,100.71 0 top
U$234  [#25#18]  58.42,116.71 90 top
U$235  [#17#17]  60.96,116.71 90 top
U$236  [#16#15]  63.5,116.71 90 top
U$237  [#14#14]  66.04,116.71 90 top
U$238  [#13#5]  68.58,116.71 90 top
U$239  [#4#2]  71.12,116.71 90 top
U$240  [#RESET#1842]  25.02,119.89 90 top
U$241  [#BOOT#1841]  63.5,112.4 0 top
U$242  [#JTAG#1847]  64.14,100.71 0 top
U$243  [#A0#1843]  76.2,73.28 90 top
U$244  [#A3#1843]  73.66,73.28 90 top
U$245  [#A6#1843]  71.12,73.28 90 top
U$246  [#A7#1843]  68.58,73.28 90 top
U$247  [#A4#1843]  66.04,73.28 90 top
U$248  [#A5#1843]  63.5,73.28 90 top
U$249  [#VIN#1843]  58.42,73.28 90 top
U$250  [#GND#1844]  55.88,73.28 90 top
U$251  [#GND#1844]  53.34,73.28 90 top
U$252  [#5V#1845]  50.8,73.28 90 top
U$253  [#3#3V#1845]  48.26,73.28 90 top
U$254  [##RST##1845]  45.72,73.28 90 top
U$255  [#REF#1846]  43.18,73.28 90 top
U$256  [#MEAS#1851]  52.7,111.51 0 top
U$257  [#1849]  33.27,76.33 0 top
U$258  [#1850]  35.81,76.33 0 top
U$259  [#BATT#1848]  34.29,80.65 0 bottom
U$260  [#JTAG#1847]  64.14,100.71 0 bottom
U$261  [ESP321855]  53.34,84.2 90 top
U$262  [#39#A3#321862]  73.66,67.56 90 bottom
U$263  [#36#A0#321862]  76.2,67.56 90 bottom
U$264  [#34#A6#32321865]  66.04,67.56 90 bottom
U$265  [#35#A7#321862]  68.58,67.56 90 bottom
U$266  [#32#A4#32321865]  63.5,67.56 90 bottom
U$267  [#34#A6#321862]  71.12,67.56 90 bottom
U$268  [#VIN#321862]  58.42,67.56 90 bottom
U$269  [#GND#321863]  55.88,67.56 90 bottom
U$270  [#5V#321864]  50.8,67.56 90 bottom
U$271  [#3#3V#321864]  48.26,67.56 90 bottom
U$272  [#GND#321863]  53.34,67.56 90 bottom
U$273  [##RESET##321864]  45.72,67.56 90 bottom
U$274  [#IOREF#321865]  43.18,67.56 90 bottom
U$275  [#13#TCK#32321869]  68.58,122.43 90 bottom
U$276  [#14#TMS#32321869]  66.04,122.43 90 bottom
U$277  [#16#32321869]  63.5,122.43 90 bottom
U$278  [#17#32321869]  60.96,122.43 90 bottom
U$279  [#25#32321869]  58.42,122.43 90 bottom
U$280  [#26#32321869]  54.36,122.43 90 bottom
U$281  [#5##CS##32321869]  49.28,122.43 90 bottom
U$282  [#23#PICO#321866]  46.74,122.43 90 bottom
U$283  [#19#POCI#321866]  44.2,122.43 90 bottom
U$284  [#18#SCK#32321869]  41.66,122.43 90 bottom
U$285  [#21#SDA#32321869]  34.04,122.43 90 bottom
U$286  [#22#SCL#32321869]  31.5,122.43 90 bottom
U$287  [#27#32321869]  51.82,122.43 90 bottom
U$288  [#GND#321866]  39.12,122.43 90 bottom
U$289  [#3#3V#321866]  36.58,122.43 90 bottom
U$290  [D#32321863]  15.49,108.59 0 bottom
U$291  [D#32321862]  15.37,106.81 0 bottom
U$292  [G32321864]  15.37,105.03 0 bottom
U$293  [#1849]  33.02,76.33 0 bottom
U$294  [#1850]  35.56,76.33 0 bottom
U$295  [#I2C#1855]  73.66,109.22 90 bottom
U$296  [##ALERT##1852]  71.12,110.49 90 bottom
U$297  [#TMS#1854]  66.04,110.36 90 bottom
U$298  [#TCK#1853]  68.58,110.36 90 bottom
U$299  [INPUT_ONLY321867]  72.39,78.23 0 top
U$300  [INPUT_ONLY321867]  72.39,76.71 0 bottom
U$301  [REDBOARD_LOGO]  59.69,87.38 0 bottom
U$302  [#IOT#132321869]  53.34,95.38 90 top
U$303  [ESP32321856]  53.97,85.98 0 bottom
U$304  [#IOT#132321874]  40.13,97.16 0 bottom
U$305  [7#15V32321861]  17.02,76.96 90 bottom
U$306  [3#3V_LOGIC_SHIELDS_ONLY132321876]  48.26,83.06 0 bottom
U$307  [#3#RX#0#0]  76.2,116.71 90 top
U$308  [#1#TX#0#0]  73.66,116.71 90 top
U$309  [#4##ALERT##0]  71.12,122.43 90 bottom
U$310  [#3#RX#0#4]  76.2,122.43 90 bottom
U$311  [#1#TX#0#2]  73.66,122.43 90 bottom
U$312  [#5##CS##0]  49.28,116.71 90 top
U$313  [#BYP#0]  57.78,107.06 0 bottom
U$314  [#SHLD#0]  13.97,114.94 90 bottom
U$315  [RGB0]  53.34,81.41 0 top
U$316  [#MEAS#1851]  52.7,111.51 0 bottom
U$317  [POLARITY_MARKING_CENTER_POSITIVE#JPG]  24.13,69.09 270 top
U$318  [POLARITY_MARKING_CENTER_POSITIVE#JPG]  21.97,76.96 270 bottom
U$319  [7V#0]  17.78,71.76 0 top
U$320  [15V0]  17.78,70.48 0 top
U$321  [#SD_DET#0]  60.96,110.36 90 bottom
U$322  [#LED_18#0]  34.67,110.87 0 bottom
U$323  [#LED_TX#0]  34.67,108.33 0 bottom
U$324  [#LED_RX#0]  34.67,105.79 0 bottom
U$325  [#LED_PWR#0]  34.67,103.25 0 bottom
U$326  [#LED_CHG#0]  34.67,100.71 0 bottom
U$327  [GPIO20]  53.34,80.14 0 top
U$328  [V323252]  90.3,110.36 0 bottom
U$329  [#SCL#34]  106.43,116.71 90 top
U$330  [#SDA#33]  108.97,116.71 90 top
U$331  [#3#3V#33]  111.51,116.71 90 top
U$332  [#GND#32]  114.05,116.71 90 top
U$333  [#SCK#31]  116.59,116.71 90 top
U$334  [#POCI#30]  119.13,116.71 90 top
U$335  [#PICO#29]  121.67,116.71 90 top
U$336  [1836]  121.03,110.87 0 top
U$337  [#27#27]  126.75,116.71 90 top
U$338  [#26#26]  129.29,116.71 90 top
U$339  [TX1838]  121.03,108.33 0 top
U$340  [RX1839]  121.03,105.79 0 top
U$341  [PWR1837]  121.03,103.25 0 top
U$342  [CHG1840]  121.03,100.71 0 top
U$343  [#25#18]  133.35,116.71 90 top
U$344  [#17#17]  135.89,116.71 90 top
U$345  [#16#15]  138.43,116.71 90 top
U$346  [#14#14]  140.97,116.71 90 top
U$347  [#13#5]  143.51,116.71 90 top
U$348  [#4#2]  146.05,116.71 90 top
U$349  [#RESET#1842]  99.95,119.89 90 top
U$350  [#BOOT#1841]  138.43,112.4 0 top
U$351  [#JTAG#1847]  139.06,100.71 0 top
U$352  [#A0#1843]  151.13,73.28 90 top
U$353  [#A3#1843]  148.59,73.28 90 top
U$354  [#A6#1843]  146.05,73.28 90 top
U$355  [#A7#1843]  143.51,73.28 90 top
U$356  [#A4#1843]  140.97,73.28 90 top
U$357  [#A5#1843]  138.43,73.28 90 top
U$358  [#VIN#1843]  133.35,73.28 90 top
U$359  [#GND#1844]  130.81,73.28 90 top
U$360  [#GND#1844]  128.27,73.28 90 top
U$361  [#5V#1845]  125.73,73.28 90 top
U$362  [#3#3V#1845]  123.19,73.28 90 top
U$363  [##RST##1845]  120.65,73.28 90 top
U$364  [#REF#1846]  118.11,73.28 90 top
U$365  [#MEAS#1851]  127.64,111.51 0 top
U$366  [#1849]  108.2,76.33 0 top
U$367  [#1850]  110.74,76.33 0 top
U$368  [#BATT#1848]  109.22,80.65 0 bottom
U$369  [#JTAG#1847]  139.06,100.71 0 bottom
U$370  [ESP321855]  128.27,84.2 90 top
U$371  [#39#A3#321862]  148.59,67.56 90 bottom
U$372  [#36#A0#321862]  151.13,67.56 90 bottom
U$373  [#34#A6#32321865]  140.97,67.56 90 bottom
U$374  [#35#A7#321862]  143.51,67.56 90 bottom
U$375  [#32#A4#32321865]  138.43,67.56 90 bottom
U$376  [#34#A6#321862]  146.05,67.56 90 bottom
U$377  [#VIN#321862]  133.35,67.56 90 bottom
U$378  [#GND#321863]  130.81,67.56 90 bottom
U$379  [#5V#321864]  125.73,67.56 90 bottom
U$380  [#3#3V#321864]  123.19,67.56 90 bottom
U$381  [#GND#321863]  128.27,67.56 90 bottom
U$382  [##RESET##321864]  120.65,67.56 90 bottom
U$383  [#IOREF#321865]  118.11,67.56 90 bottom
U$384  [#13#TCK#32321869]  143.51,122.43 90 bottom
U$385  [#14#TMS#32321869]  140.97,122.43 90 bottom
U$386  [#16#32321869]  138.43,122.43 90 bottom
U$387  [#17#32321869]  135.89,122.43 90 bottom
U$388  [#25#32321869]  133.35,122.43 90 bottom
U$389  [#26#32321869]  129.29,122.43 90 bottom
U$390  [#5##CS##32321869]  124.21,122.43 90 bottom
U$391  [#23#PICO#321866]  121.67,122.43 90 bottom
U$392  [#19#POCI#321866]  119.13,122.43 90 bottom
U$393  [#18#SCK#32321869]  116.59,122.43 90 bottom
U$394  [#21#SDA#32321869]  108.97,122.43 90 bottom
U$395  [#22#SCL#32321869]  106.43,122.43 90 bottom
U$396  [#27#32321869]  126.75,122.43 90 bottom
U$397  [#GND#321866]  114.05,122.43 90 bottom
U$398  [#3#3V#321866]  111.51,122.43 90 bottom
U$399  [D#32321863]  90.42,108.59 0 bottom
U$400  [D#32321862]  90.3,106.81 0 bottom
U$401  [G32321864]  90.3,105.03 0 bottom
U$402  [#1849]  107.95,76.33 0 bottom
U$403  [#1850]  110.49,76.33 0 bottom
U$404  [#I2C#1855]  148.59,109.22 90 bottom
U$405  [##ALERT##1852]  146.05,110.49 90 bottom
U$406  [#TMS#1854]  140.97,110.36 90 bottom
U$407  [#TCK#1853]  143.51,110.36 90 bottom
U$408  [INPUT_ONLY321867]  147.32,78.23 0 top
U$409  [INPUT_ONLY321867]  147.32,76.71 0 bottom
U$410  [REDBOARD_LOGO]  134.62,87.38 0 bottom
U$411  [#IOT#132321869]  128.27,95.38 90 top
U$412  [ESP32321856]  128.91,85.98 0 bottom
U$413  [#IOT#132321874]  115.06,97.16 0 bottom
U$414  [7#15V32321861]  91.95,76.96 90 bottom
U$415  [3#3V_LOGIC_SHIELDS_ONLY132321876]  123.19,83.06 0 bottom
U$416  [#3#RX#0#0]  151.13,116.71 90 top
U$417  [#1#TX#0#0]  148.59,116.71 90 top
U$418  [#4##ALERT##0]  146.05,122.43 90 bottom
U$419  [#3#RX#0#4]  151.13,122.43 90 bottom
U$420  [#1#TX#0#2]  148.59,122.43 90 bottom
U$421  [#5##CS##0]  124.21,116.71 90 top
U$422  [#BYP#0]  132.72,107.06 0 bottom
U$423  [#SHLD#0]  88.9,114.94 90 bottom
U$424  [RGB0]  128.27,81.41 0 top
U$425  [#MEAS#1851]  127.64,111.51 0 bottom
U$426  [POLARITY_MARKING_CENTER_POSITIVE#JPG]  99.06,69.09 270 top
U$427  [POLARITY_MARKING_CENTER_POSITIVE#JPG]  96.9,76.96 270 bottom
U$428  [7V#0]  92.71,71.76 0 top
U$429  [15V0]  92.71,70.48 0 top
U$430  [#SD_DET#0]  135.89,110.36 90 bottom
U$431  [#LED_18#0]  109.6,110.87 0 bottom
U$432  [#LED_TX#0]  109.6,108.33 0 bottom
U$433  [#LED_RX#0]  109.6,105.79 0 bottom
U$434  [#LED_PWR#0]  109.6,103.25 0 bottom
U$435  [#LED_CHG#0]  109.6,100.71 0 bottom
U$436  [GPIO20]  128.27,80.14 0 top